# Allegro board RK3568_Template_DDR4P216_ECCP116_SD6_52x40_1332MHz_V10_20210129YWQ.brd
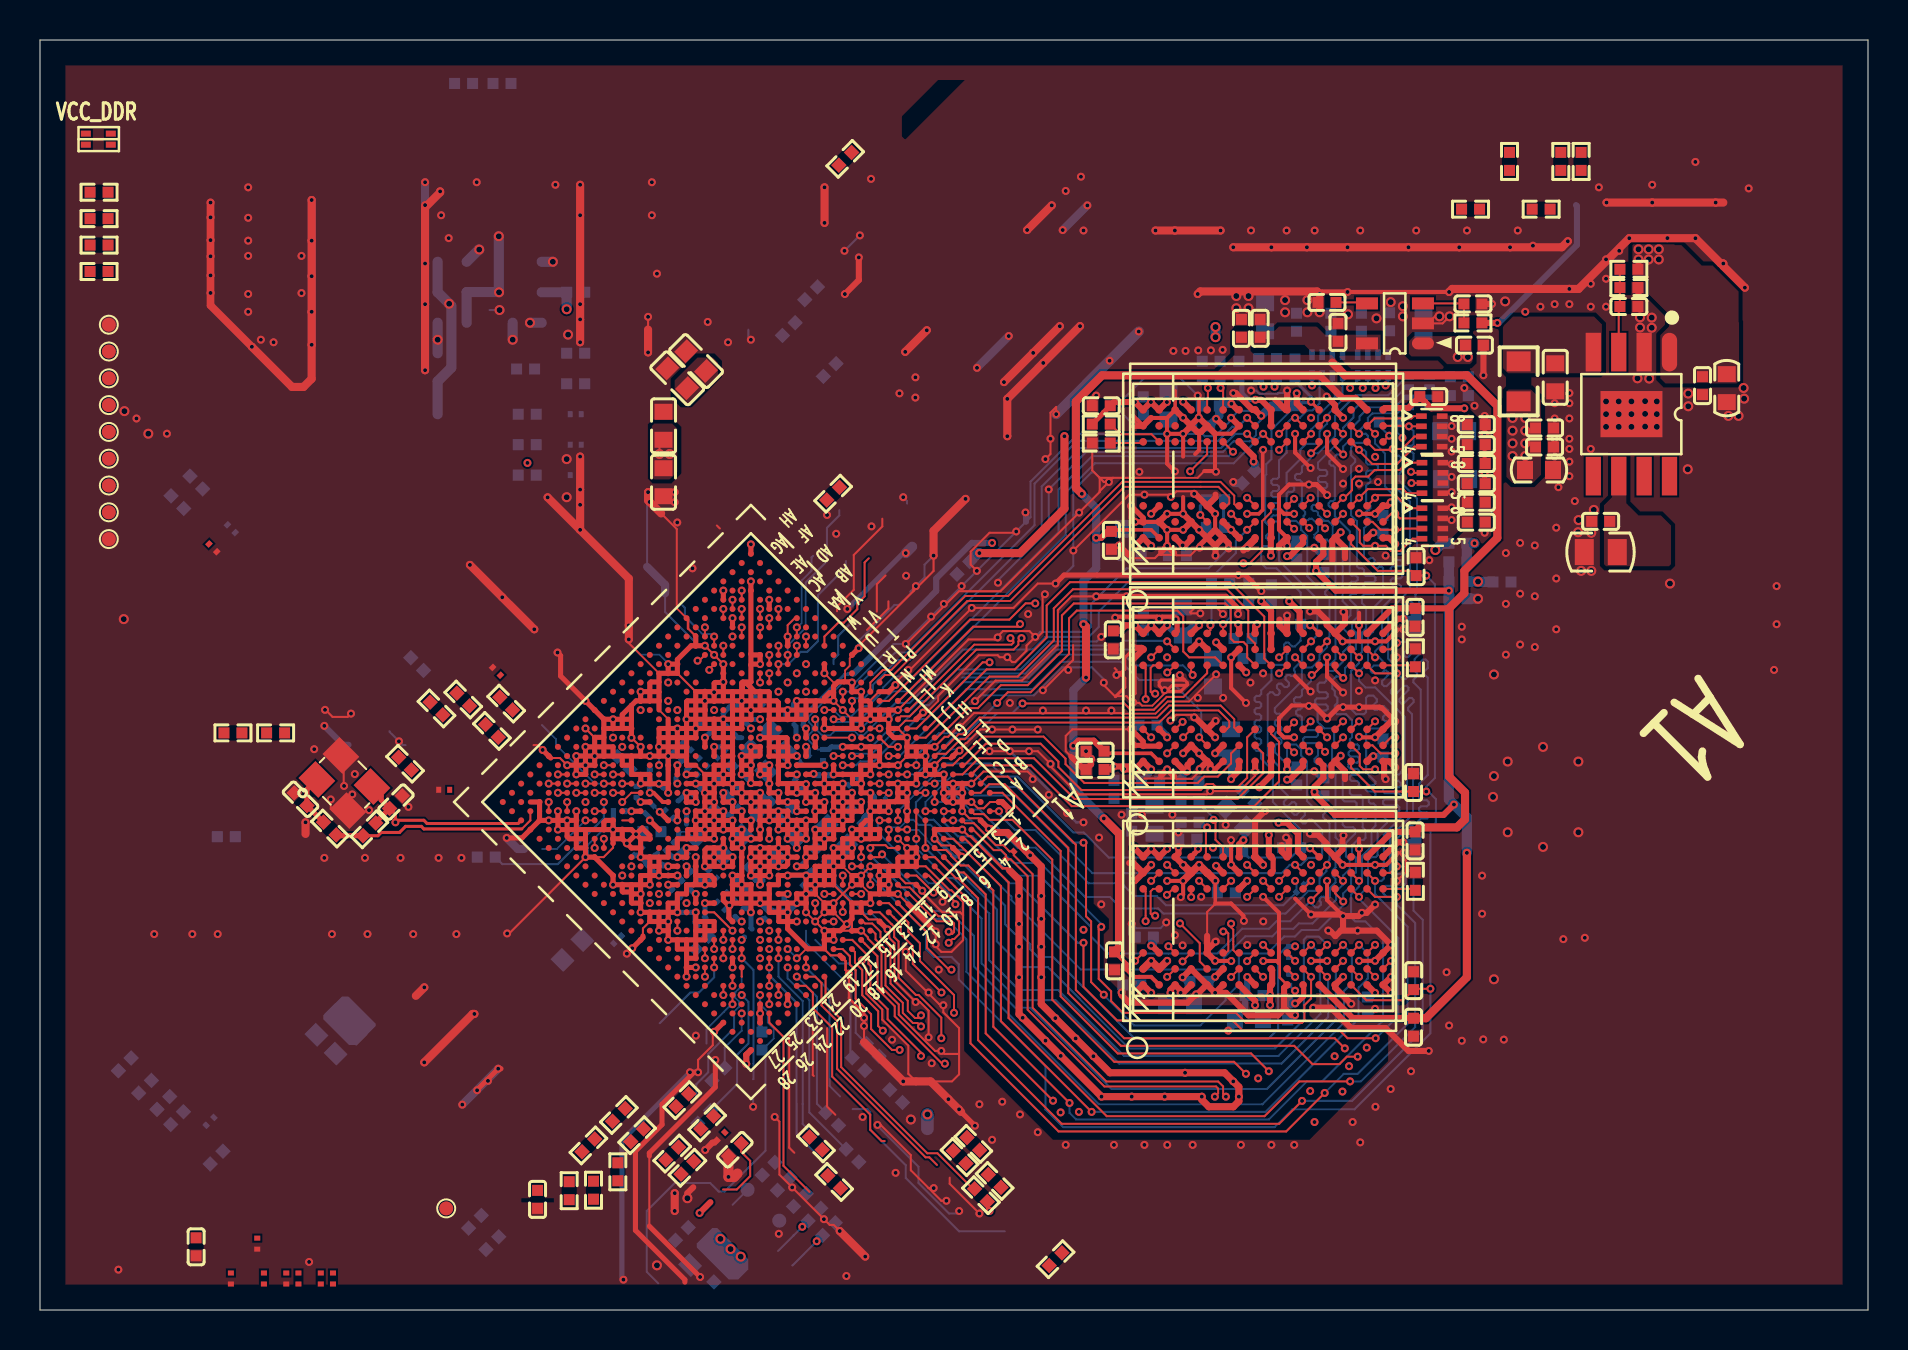
[diagram p0: board, top side]
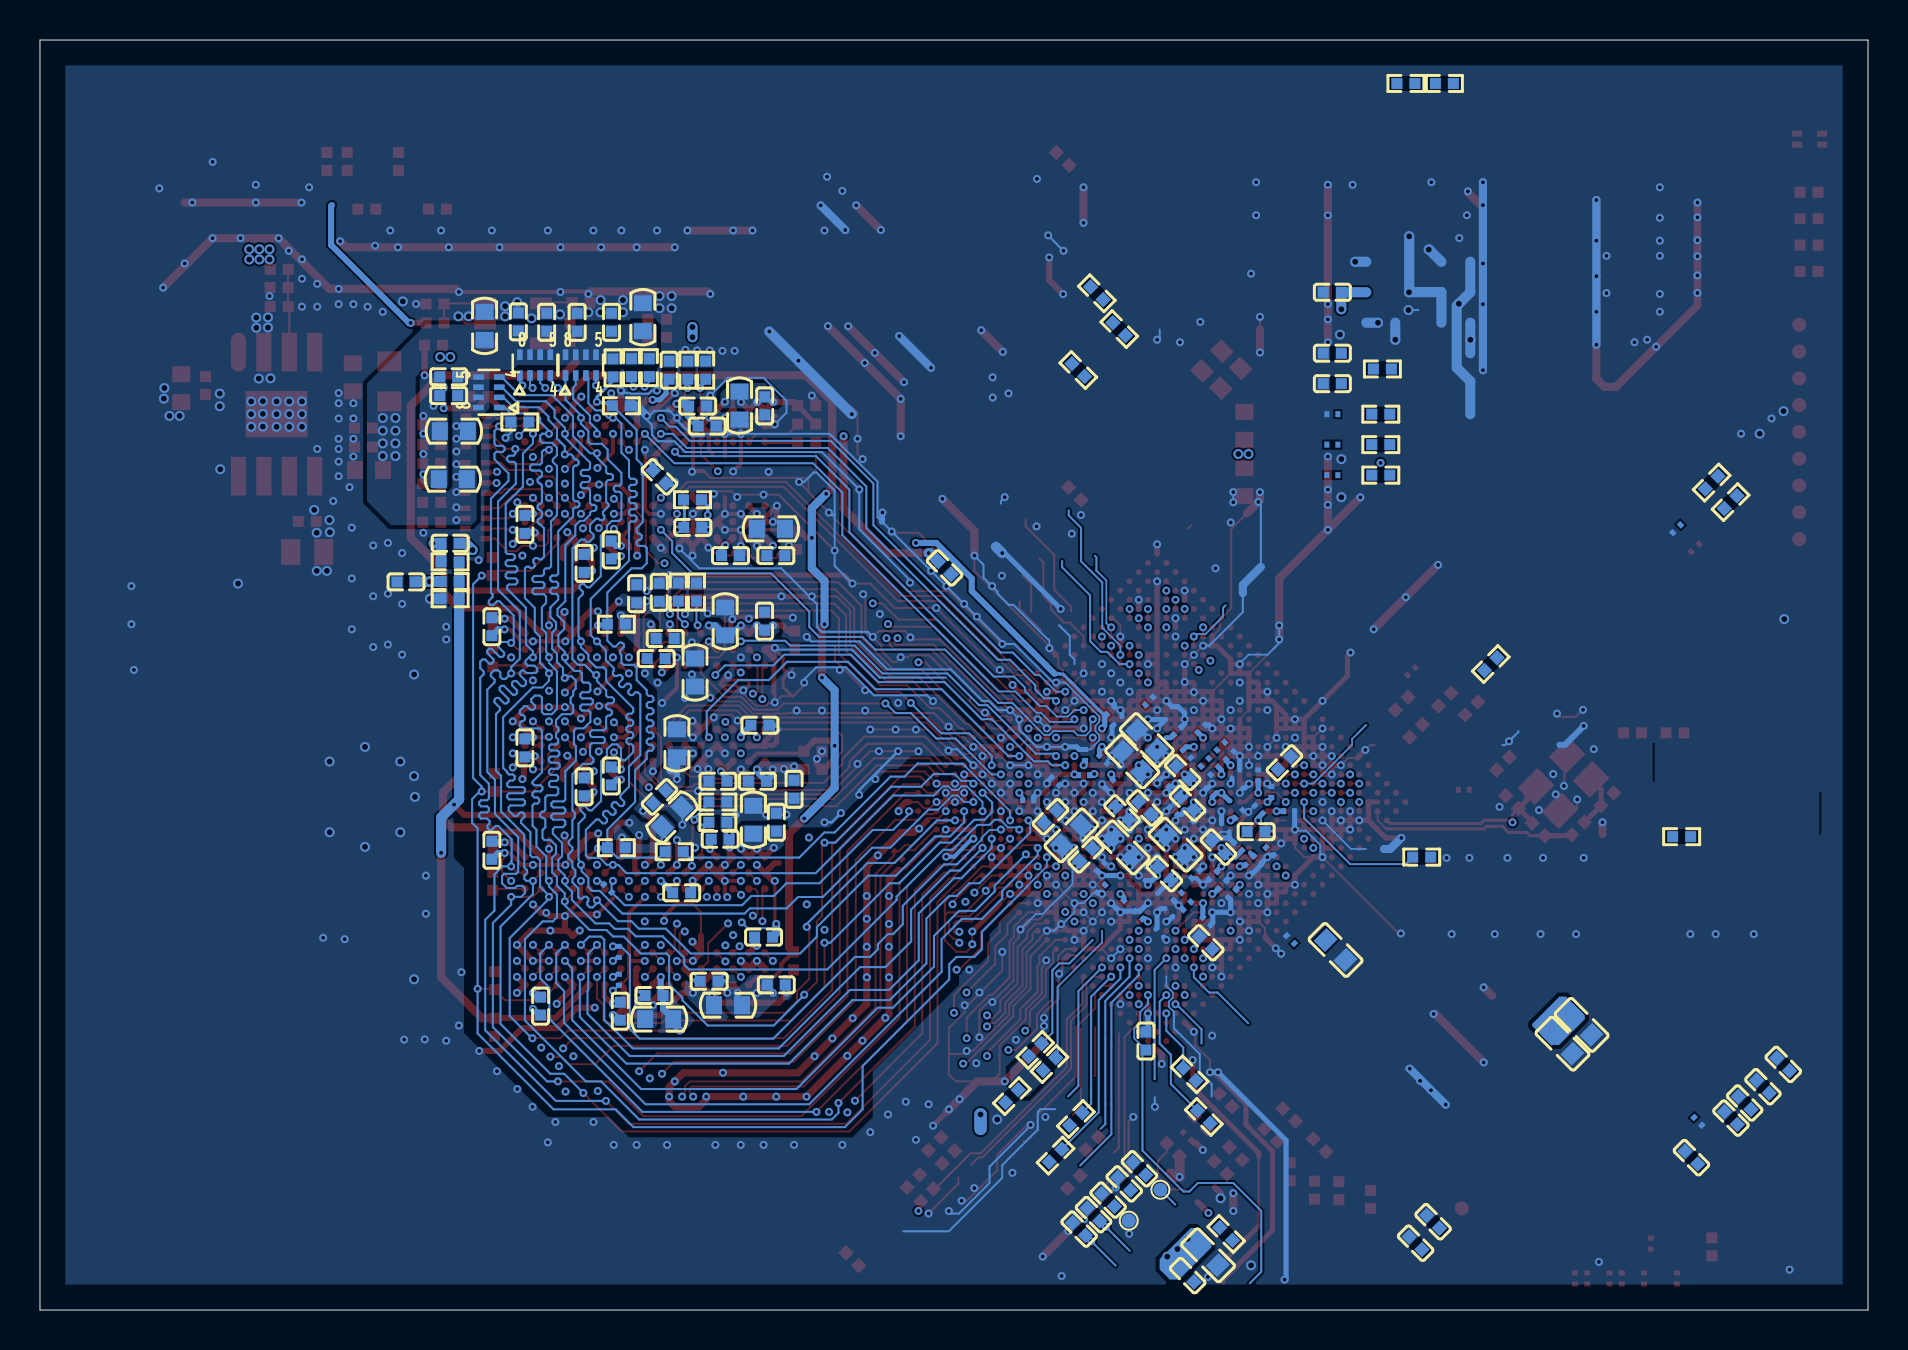
[diagram p1: board, bottom side, seen from below]

Outline 91.44 x 63.5 mm; copper layers: TOP, L2-GND1, L3-POWER, L4-S1, L5-GND2, BOTTOM. Coordinates in mm from the lower left corner of the outline.
Outline path: 0,63.5 0,0 91.44,0 91.44,63.5 0,63.5

## Design rules (mm)
net group CAN0_RX_M1: nets CAN0_RX_M1 SDMMC0_CLK
net group CIF_CLKOUT: nets CIF_CLKOUT CIF_CLKOUT_SOC
net group CLK0: nets PCIE20_REFCLKN PCIE20_REFCLKP
net group CLK32K_OUT1_WIFI: nets CLK32K_OUT1_WIFI GPIO2_C6
net group DDR4_CLK: nets DDR4_CLKN DDR4_CLKP
net group DDR4_DQSL_A: nets DDR4_DQSL_N_A DDR4_DQSL_P_A
net group DDR4_DQSL_B: nets DDR4_DQSL_N_B DDR4_DQSL_P_B
net group DDR4_DQSU_A: nets DDR4_DQSU_N_A DDR4_DQSU_P_A
net group DDR4_DQSU_B: nets DDR4_DQSU_N_B DDR4_DQSU_P_B
net group DDR4_ECC_DQS: nets DDR4_ECC_DQS_N DDR4_ECC_DQS_P
net group DP1: nets EDP_TX_D0N EDP_TX_D0P
net group DP_EDP_TXD0: nets EDP_TXD0N EDP_TXD0P
net group DP_HDMI_TX1: nets HDMI_TX1N HDMI_TX1P
net group DP_HDMI_TX2: nets HDMI_TX2N HDMI_TX2P
net group DP_TX_AUX: nets EDP_TX_AUXN EDP_TX_AUXP
net group EDP_TXD1N: nets EDP_TX_D1N EDP_TXD1N
net group EDP_TXD2N: nets EDP_TX_D2N EDP_TXD2N
net group EDP_TXD3N: nets EDP_TX_D3N EDP_TXD3N
net group EDP_TXD3P: nets EDP_TX_D3P EDP_TXD3P
net group EMMC_CLKOUT/FLASH_DQS: nets EMMC_CLKOUT/FLASH_DQS EMMC_CLKOUT/FLASH_DQS_SOC
net group ETH1_REFCLKO_25M_M1: nets ETH1_REFCLKO_25M_M1 ETH1_REFCLKO_25M_M1_SOC
net group GMAC0_TXD0: nets GMAC0_TXD0 UART1_RX_M0
net group GMAC0_TXD1: nets GMAC0_TXD1 UART1_TX_M0
net group GMAC0_TXD2: nets GMAC0_TXD2 SDMMC1_D3
net group GMAC0_TXD3: nets GMAC0_TXD3 SDMMC1_CMD
net group GMAC1_TXCLK_M1: nets GMAC1_TXCLK_M1 GMAC1_TXCLK_M1_SOC
net group GMAC1_TXD0_M1: nets GMAC1_TXD0_M1 GMAC1_TXD0_M1_SOC
net group GMAC1_TXD2_M1: nets GMAC1_TXD2_M1 GMAC1_TXD2_M1_SOC
net group GMAC1_TXD3_M1: nets GMAC1_TXD3_M1 GMAC1_TXD3_M1_SOC
net group HDMI_TX0N: nets HDMI_TX0N HDMI_TX0N_PORT
net group HDMI_TX0P: nets HDMI_TX0P HDMI_TX0P_PORT
net group HDMI_TX1: nets HDMI_TX1N_PORT HDMI_TX1P_PORT
net group HDMI_TX2: nets HDMI_TX2N_PORT HDMI_TX2P_PORT
net group HDMI_TXCLKN: nets HDMI_TXCLKN HDMI_TXCLKN_PORT
net group HDMI_TXCLKP: nets HDMI_TXCLKP HDMI_TXCLKP_PORT
net group I2S3_SCLK_M0: nets I2S3_SCLK_M0 I2S3_SCLK_M0_SOC
net group LVDS_TX1_CLK: nets MIPI_DSI_TX1_CLKN MIPI_DSI_TX1_CLKP
net group LVDS_TX1_D0: nets MIPI_DSI_TX1_D0N MIPI_DSI_TX1_D0P
net group LVDS_TX1_D1: nets MIPI_DSI_TX1_D1N MIPI_DSI_TX1_D1P
net group LVDS_TX1_D2: nets MIPI_DSI_TX1_D2N MIPI_DSI_TX1_D2P
net group LVDS_TX1_D3: nets MIPI_DSI_TX1_D3N MIPI_DSI_TX1_D3P
net group MIPI_CSI_RX_CLK0: nets MIPI_CSI_RX_CLK0N MIPI_CSI_RX_CLK0P
net group MIPI_CSI_RX_CLK1: nets MIPI_CSI_RX_CLK1N MIPI_CSI_RX_CLK1P
net group MIPI_CSI_RX_D0: nets MIPI_CSI_RX_D0N MIPI_CSI_RX_D0P
net group MIPI_CSI_RX_D1: nets MIPI_CSI_RX_D1N MIPI_CSI_RX_D1P
net group MIPI_CSI_RX_D2: nets MIPI_CSI_RX_D2N MIPI_CSI_RX_D2P
net group MIPI_CSI_RX_D3: nets MIPI_CSI_RX_D3N MIPI_CSI_RX_D3P
net group MIPI_DSI_TX0_CLK: nets MIPI_DSI_TX0_CLKN/LVDS_TX0_CLKN MIPI_DSI_TX0_CLKP/LVDS_TX0_CLKP
net group MIPI_DSI_TX0_D0: nets MIPI_DSI_TX0_D0N/LVDS_TX0_D0N MIPI_DSI_TX0_D0P/LVDS_TX0_D0P
net group MIPI_DSI_TX0_D1: nets MIPI_DSI_TX0_D1N/LVDS_TX0_D1N MIPI_DSI_TX0_D1P/LVDS_TX0_D1P
net group MIPI_DSI_TX0_D2: nets MIPI_DSI_TX0_D2N/LVDS_TX0_D2N MIPI_DSI_TX0_D2P/LVDS_TX0_D2P
net group MIPI_DSI_TX0_D3: nets MIPI_DSI_TX0_D3N/LVDS_TX0_D3N MIPI_DSI_TX0_D3P/LVDS_TX0_D3P
net group PCIE30_REFCLK_IN: nets PCIE30_REFCLKN_IN PCIE30_REFCLKP_IN
net group PCIE30_RX0: nets PCIE30_RX0N PCIE30_RX0P
net group PCIE30_RX1: nets PCIE30_RX1N PCIE30_RX1P
net group PCIE30_TX0: nets PCIE30_TX0N PCIE30_TX0P
net group PCIE30_TX1: nets PCIE30_TX1N PCIE30_TX1P
net group SARADC_VIN0_KEY/RECOVERY: nets SARADC_VIN0_KEY/RECOVERY VCCA_1V8
net group SDMMC0_D2/ARMJTAG_TCK: nets N17520091 SDMMC0_D2/ARMJTAG_TCK
net group SDMMC0_D3/ARMJTAG_TMS: nets N17520047 SDMMC0_D3/ARMJTAG_TMS
net group USB2_HOST2D: nets USB2_HOST2_DM USB2_HOST2_DP
net group USB2_HOST3D: nets USB2_HOST3_DM USB2_HOST3_DP
net group USB3_HOST1D: nets USB3_HOST1_DM USB3_HOST1_DP
net group USB3_OTG0D: nets USB3_OTG0_DM USB3_OTG0_DP
net group DDR_ADD: nets DDR4_RESETN
net group DP2: nets EDP_TXD2P
net group DP3: nets EDP_TXD1P
net group GMAC0_INT/PMEB_GPIO3_C0: nets GMAC0_INT/PMEB_GPIO3_C0 GMAC1_INT/PMEB_GPIO3_A7 I2C2_SCL_M1 I2C5_SDA_M0 VCC_1V8 VCC_3V3 VCCIO4 VCCIO6 VCCIO_WL
net group GMAC0_TXCLK: nets GMAC0_TXCLK GPIO2_B0 SDMMC1_CLK

## Placement (name value [footprint] x y rotation side)
C1000  100nF  [C0402]  34.03 1.72 225 bottom
C1001  4.7uF  [C0402]  35.2 21.81 225 bottom
C1002  22uF  [C0603]  33.02 2.74 225 bottom
C1003  22uF  [C0603]  37.28 23.13 45 bottom
C1004  22uF  [C0603]  26.63 18 225 bottom
C1005  100nF  [C0201]  34.73 24.96 225 bottom
C1006  4.7uF  [C0402]  34.05 25.34 225 bottom
C1007  1uF  [C0402]  36.18 25.1 45 bottom
C1008  1uF  [C0402]  37.32 24.85 225 bottom
C1009  22uF  [C0603]  36.81 27.43 45 bottom
C1010  22uF  [C0603]  31.87 46.59 135 top
C1011  10uF  [C0603]  32.82 47.45 135 top
C1012  100nF  [C0201]  35.17 26.37 225 bottom
C1013  4.7uF  [C0402]  34.28 26.87 225 bottom
C1014  22uF  [C0603]  36.08 28.5 45 bottom
C1015  22uF  [C0603]  31.19 41.39 270 top
C1016  10uF  [C0603]  31.19 44.21 90 top
C1017  100nF  [C0201]  33.65 21.79 315 bottom
C1018  22uF  [C0603]  34.63 23.26 45 bottom
C1019  22uF  [C0603]  15.28 13.32 225 bottom
C1020  10uF  [C0603]  14.33 14.26 225 bottom
C1100  100nF  [C0201]  38.38 22.15 315 bottom
C1101  100nF  [C0201]  40.64 26.43 45 bottom
C1102  4.7uF  [C0402]  39.12 22.76 315 bottom
C1103  4.7uF  [C0402]  40.89 24.66 315 bottom
C1104  10uF  [C0603]  39.85 23.73 315 bottom
C1111  2pF  [C0201]  48.51 22.73 225 top
C1200  100nF  [C0201]  20.22 26.01 180 top
C1201  18pF  [C0402]  13.03 25.54 135 top
C1202  18pF  [C0402]  17.81 25.4 45 top
C1203  100nF  [C0201]  29.85 25.91 90 bottom
C1204  1uF  [C0402]  6.17 10.35 45 bottom
C1205  100nF  [C0201]  30.48 25.02 45 bottom
C1206  1uF  [C0402]  4.24 12.28 45 bottom
C1207  100nF  [C0201]  28.96 24.94 180 bottom
C1208  1uF  [C0402]  26.8 50.89 0 bottom
C1209  100nF  [C0201]  37.98 26.31 315 bottom
C1210  100nF  [C0201]  30.5 26.73 90 bottom
C1211  1uF  [C0402]  26.8 47.84 0 bottom
C1212  100nF  [C0201]  39.21 26.74 0 bottom
C1213  100nF  [C0201]  31.47 24.79 135 bottom
C1214  1uF  [C0402]  5.26 11.16 45 bottom
C1300  100nF  [C0201]  37.42 20.28 315 bottom
C1301  100nF  [C0201]  33.08 19.43 225 bottom
C1400  100nF  [C0402]  24.89 5.53 270 top
C1401  100nF  [C0201]  32.3 21.25 135 bottom
C1402  100nF  [C0201]  31.81 20.81 315 bottom
C1403  100nF  [C0201]  32.76 21.72 315 bottom
C1404  100nF  [C0201]  39.16 27.75 90 bottom
C1405  100nF  [C0201]  38.25 27.53 225 bottom
C1406  100nF  [C0201]  37.9 29.97 135 bottom
C1407  100nF  [C0201]  30.95 22.05 225 bottom
C1408  100nF  [C0201]  31.52 23.16 45 bottom
C1409  4.7uF  [C0402]  32.49 23.14 45 bottom
C1410  4.7uF  [C0402]  8.83 7.62 45 bottom
C1411  100nF  [C0201]  29.92 22.94 225 bottom
C1412  100nF  [C0201]  30.54 22.5 225 bottom
C1413  4.7uF  [C0402]  30.61 23.91 180 bottom
C1414  4.7uF  [C0402]  6.86 9.59 45 bottom
C1500  100nF  [C0201]  34.06 8.69 225 top
C1501  1nF  [C0402]  34.76 8.01 225 top
C1502  1nF  [C0402]  36.12 13.45 90 bottom
C1503  1nF  [C0402]  36.45 7.06 45 bottom
C1504  1nF  [C0402]  38.01 5.5 45 bottom
C1505  1nF  [C0402]  37.2 6.31 45 bottom
C1506  1nF  [C0402]  39.46 4.05 45 bottom
C1507  1nF  [C0402]  38.74 4.77 45 bottom
C1508  1nF  [C0402]  33.12 18.36 45 bottom
C1509  100nF  [C0201]  36.47 19.75 45 bottom
C1510  100nF  [C0201]  28.89 18.52 45 bottom
C1511  100nF  [C0201]  34.54 28.96 135 bottom
C1600  100nF  [C0201]  33.33 29.06 135 bottom
C1601  100nF  [C0201]  34.07 27.81 225 bottom
C1602  100nF  [C0201]  26.8 44.79 0 bottom
C1603  1uF  [C0402]  26.8 46.32 0 bottom
C1700  100nF  [C0201]  31.91 27.73 135 bottom
C1701  100nF  [C0201]  32.69 26.95 315 bottom
C1702  100nF  [C0201]  8.65 38.11 315 top
C1703  100nF  [C0201]  9.57 39.06 315 bottom
C1704  100nF  [C0201]  32.37 28.19 135 bottom
C1705  100nF  [C0201]  33.17 27.38 315 bottom
C1706  100nF  [C0201]  26.8 43.27 0 bottom
C1707  100nF  [C0201]  26.8 41.74 0 bottom
C1708  100nF  [C0201]  14.66 1.57 270 top
C1709  100nF  [C0201]  14.05 1.57 270 top
C1710  100nF  [C0201]  12.93 1.57 270 top
C1711  100nF  [C0201]  11.2 1.57 270 top
C1712  100nF  [C0201]  12.32 1.57 270 top
C1713  100nF  [C0201]  10.87 3.32 270 top
C1714  100nF  [C0201]  9.55 1.57 270 top
C1715  1uF  [C0402]  7.81 3.16 270 top
C1716  1uF  [C0402]  29.19 27.35 135 bottom
C1717  100nF  [C0201]  34.07 20.21 315 bottom
C1718  100nF  [C0201]  34.53 20.67 315 bottom
C1719  4.7uF  [C0402]  22.63 3.34 45 bottom
C1720  4.7uF  [C0402]  21.76 4.41 45 bottom
C1800  100nF  [C0201]  35.96 30.45 135 bottom
C1900  100nF  [C0201]  38.36 21.06 315 bottom
C3500  1nF  [C0402]  68.71 16.47 90 top
C3501  1nF  [C0402]  68.71 26.37 90 top
C3502  100nF  [C0402]  73.13 36.4 0 bottom
C3504  10uF  [C0603]  70.79 41.54 0 bottom
C3505  1uF  [C0402]  71.84 42.33 0 top
C3506  100nF  [C0402]  71.84 43.27 0 top
C3507  10nF  [C0402]  71.84 44.27 0 top
C3509  10uF  [C0603]  70.74 43.94 0 bottom
C3510  1uF  [C0402]  71.84 40.39 0 top
C3511  100nF  [C0402]  71.84 39.39 0 top
C3512  10nF  [C0402]  71.84 41.32 0 top
C3513  1nF  [C0402]  68.83 37.17 90 top
C3514  10uF  [C0603]  61.28 49.64 90 bottom
C3515  1uF  [C0402]  64.57 49.39 90 bottom
C3516  100nF  [C0402]  62.85 49.39 90 bottom
C3517  10nF  [C0402]  66.1 49.39 90 bottom
C3518  10uF  [C0603]  69.2 49.21 90 bottom
C3519  1uF  [C0402]  67.51 49.41 90 bottom
C3520  100nF  [C0402]  71 45.72 0 bottom
C3521  10nF  [C0402]  71 46.66 0 bottom
C3522  1nF  [C0402]  70.92 38.34 0 bottom
C3523  1nF  [C0402]  46.19 37.11 225 bottom
C3524  1nF  [C0402]  64.22 26.16 90 bottom
C3525  1nF  [C0402]  64.22 37.33 90 bottom
C3526  1nF  [C0402]  68.71 14.14 270 top
C3527  100nF  [C0402]  53.09 45.21 180 top
C3528  100nF  [C0402]  62.41 14.94 270 bottom
C3529  22uF  [C0603]  75.79 46.63 270 top
C3530  1uF  [C0402]  71.75 48.24 0 top
C3531  4.7uF  [C0402]  64.93 48.88 90 top
C3532  4.7uF  [C0402]  61.03 49.08 90 top
C3533  100nF  [C0402]  68.78 34.63 270 top
C3534  100nF  [C0402]  53.75 17.46 270 top
C3535  100nF  [C0402]  52.78 27.94 180 top
C3536  100nF  [C0402]  53.59 38.48 270 top
C3537  100nF  [C0402]  68.78 23.46 270 top
C3538  100nF  [C0402]  60.1 49.08 90 top
C3547  10uF  [C0603]  84.37 46.09 270 top
C3548  100nF  [C0402]  83.16 46.22 270 top
C3549  DNP  [C0402]  64.38 50.38 180 top
C3550  DNP  [C0402]  71.68 50.3 0 top
C3551  10uF  [C0805]  78.07 37.9 180 top
C3552  100nF  [C0402]  78.07 39.43 180 top
C3553  100nF  [C0402]  79.48 50.17 0 top
C3554  22uF  [C0603]  74.98 42 0 top
C3555  100nF  [C0402]  75.26 43.15 0 top
C3556  10nF  [C0402]  75.26 44.1 0 top
C3557  10uF  [C0603]  57.17 34.43 90 bottom
C3558  10uF  [C0603]  55.75 24.51 90 bottom
C3559  10uF  [C0603]  59.82 24.64 135 bottom
C3560  100nF  [C0402]  60.46 35.89 90 bottom
C3561  100nF  [C0402]  69.47 45.67 0 top
C3562  100nF  [C0402]  55.2 34.44 90 bottom
C3563  100nF  [C0402]  59.97 46.99 90 bottom
C3564  100nF  [C0402]  54.63 37.72 180 bottom
C3565  100nF  [C0402]  68.83 22.99 270 bottom
C3566  100nF  [C0402]  53.69 33.51 270 top
C3567  1uF  [C0402]  61.59 35.81 90 bottom
C3568  100nF  [C0402]  60.73 15.72 180 bottom
C3569  100nF  [C0402]  57.53 26.44 0 bottom
C3570  100nF  [C0402]  68.83 34.16 270 bottom
C3571  100nF  [C0402]  55.55 26.44 0 bottom
C3572  100nF  [C0402]  55.43 29.24 180 bottom
C3573  100nF  [C0402]  55.19 45.2 270 bottom
C3574  100nF  [C0402]  67.18 28.11 90 bottom
C3575  100nF  [C0402]  58.79 39.13 180 bottom
C3576  100nF  [C0402]  60.17 33.58 0 bottom
C3577  100nF  [C0402]  57.42 23.54 180 bottom
C3578  100nF  [C0402]  62.87 26.7 90 bottom
C3579  100nF  [C0402]  55.25 18.64 180 bottom
C3580  100nF  [C0402]  66.4 15.2 270 bottom
C3581  100nF  [C0402]  67.18 39.28 90 bottom
C3582  100nF  [C0402]  58.54 45.2 180 bottom
C3583  1uF  [C0402]  52.78 27.03 180 top
C3584  100nF  [C0402]  62.87 38 90 bottom
C3585  100nF  [C0402]  60.45 41.66 225 bottom
C3586  100nF  [C0402]  60.45 25.65 315 bottom
C3587  22uF  [C0603]  58.67 31.88 270 bottom
C3588  22uF  [C0603]  56.45 45.22 270 bottom
C3589  10uF  [C0603]  60.47 14.55 180 bottom
C3590  100nF  [C0402]  58.06 44.2 180 bottom
C3591  100nF  [C0402]  54.61 16.26 180 bottom
C3592  100nF  [C0402]  56.9 37.72 180 bottom
C3593  100nF  [C0402]  59.34 20.86 180 bottom
C3594  22uF  [C0603]  57.02 15.24 0 bottom
C3595  10uF  [C0603]  59.58 28.33 90 bottom
C3596  10uF  [C0603]  54.88 39.06 180 bottom
C3597  100nF  [C0402]  53.72 26.03 270 bottom
C3598  100nF  [C0402]  54.61 24.39 90 bottom
C3599  100nF  [C0402]  57.97 16.44 180 bottom
C*  VAL  [unnamed#2]  60.62 32.57 0 bottom
L1700  NC  [RP2_0405]  2.92 58.54 0 top
NOREF  -  []  -65.94 -91.24 0 top
NOREF#2  -  []  -59.13 -91.44 0 top
NOREF#3  -  []  -105.26 -81.69 0 top
NOREF#4  -  []  -21.07 -6.55 0 top
NOREF#5  -  []  -89.51 -101.09 0 top
NOREF#6  -  []  52.32 77.98 0 top
NOREF#7  -  []  -47.96 -107.9 0 top
R1100  120R  [R0201]  42.01 25.5 180 bottom
R1200  22R  [R0402]  14.5 24.07 315 top
R1201  0R  [R0402]  18.26 27.32 315 top
R1202  1M  [R0402]  16.48 24.03 45 top
R1203  22R  [R0402]  11.79 28.85 180 top
R1204  2.2K  [R0402]  9.65 28.85 180 top
R1205  2.2K  [R0402]  22.32 22.64 180 bottom
R1206  2.2K  [R0402]  9.32 23.67 180 bottom
R1207  2.2K  [R0402]  18.87 32.3 315 bottom
R1300  22R  [R0402]  38.81 8.33 315 top
R1301  22R  [R0402]  50.8 2.54 45 top
R1302  22R  [R0402]  39.62 9.55 315 bottom
R1303  22R  [R0402]  39.73 6.4 315 top
R1304  22R  [R0402]  40.64 7.72 315 bottom
R1400  200R  [R0201]  8.51 9.43 225 bottom
R1500  22R  [R0402]  29.87 8.74 225 top
R1501  22R  [R0402]  28.9 6.91 270 top
R1502  22R  [R0402]  32.39 7.11 225 top
R1503  22R  [R0402]  33.38 9.37 225 top
R1504  22R  [R0402]  31.62 7.82 225 top
R1505  22R  [R0402]  32.13 10.49 225 top
R1506  22R  [R0402]  33.93 11.79 225 bottom
R1507  22R  [R0402]  33.22 9.65 225 bottom
R1508  0R  [R0402]  28.96 9.75 225 top
R1509  0R  [R0402]  27.43 8.23 225 top
R1510  0R  [R0402]  26.47 5.97 270 top
R1511  0R  [R0402]  27.69 5.99 270 top
R1512  10K  [R0402]  32.11 3.81 225 bottom
R1600  22R  [R0402]  24.29 47.05 180 bottom
R1601  22R  [R0402]  24.37 44.79 180 bottom
R1602  22R  [R0402]  75.09 55.04 0 top
R1603  22R  [R0402]  77.09 57.43 90 top
R1604  22R  [R0402]  2.95 55.89 0 top
R1605  22R  [R0402]  2.95 54.57 0 top
R1606  2.2K  [R0402]  23.11 61.33 0 bottom
R1607  2.2K  [R0402]  21.19 61.33 180 bottom
R1608  22R  [R0402]  76.07 57.43 90 top
R1609  22R  [R0402]  71.56 55.04 0 top
R1610  0R  [R0402]  73.51 57.43 90 top
R1611  0R  [R0402]  2.95 51.93 0 top
R1700  2.2R  [R0402]  7.82 41.37 135 bottom
R1701  2.2R  [R0402]  24.37 41.74 180 bottom
R1702  2.2R  [R0402]  6.87 40.39 135 bottom
R1703  2.2R  [R0402]  24.37 43.27 180 bottom
R1704  2.2R  [R0402]  19.83 30.08 135 top
R1705  2.2R  [R0402]  21.17 30.52 135 top
R1706  2.2R  [R0402]  22.61 28.96 135 top
R1707  2.2R  [R0402]  23.32 30.32 135 top
R1708  1.62K  [R0201]  22.84 31.93 135 top
R1800  10K  [R0402]  40.28 57.56 45 top
R1801  10K  [R0402]  37.45 49.05 45 bottom
R1802  22R  [R0402]  38.57 50.84 45 bottom
R1803  22R  [R0402]  39.67 40.82 45 top
R1804  2.2K  [R0402]  2.95 53.25 0 top
R1805  2.2K  [R0402]  39.5 47 45 bottom
R1900  2.2K  [R0402]  42.82 10.69 315 bottom
R1901  2.2K  [R0402]  47.75 6.45 315 top
R1902  22R  [R0402]  46.69 8.31 315 top
R1903  22R  [R0402]  41.66 13 135 bottom
R1904  22R  [R0402]  40.94 12.29 135 bottom
R1905  22R  [R0402]  47.07 5.74 315 top
R1906  22R  [R0402]  46 7.65 315 top
R3500  240R  [R0402]  59.51 35.9 90 bottom
R3501  240R  [R0402]  57.53 25.4 180 bottom
R3502  49.9R  [R0201]  62.48 16.51 270 bottom
R3503  49.9R  [R0201]  63.04 21.08 225 bottom
R3504  49.9R  [R0201]  62.48 17.91 90 bottom
R3507  0R  [R0402]  53.09 43.35 0 top
R3508  0R  [R0402]  58.8 40.51 180 bottom
R3509  0R  [R0402]  53.09 44.3 0 top
R3512  240R  [R0402]  59.03 46.99 90 bottom
R3513  1K  [R0402]  70.92 36.42 180 bottom
R3514  0R  [R0402]  70.92 37.41 0 bottom
R3515  1K  [R0402]  70.92 35.56 0 bottom
R3516  10K  [R0402]  71.68 49.35 180 top
R3517  100K  [R0402]  79.48 52.04 180 top
R3518  100K  [R0402]  79.48 51.12 0 top
R3521  39R  [R0402]  61.85 47.12 90 bottom
R3522  39R  [R0402]  60.96 47.12 90 bottom
R3523  39R  [R0402]  62.78 47.1 90 bottom
R3524  0R  [R0402]  68.8 32.61 90 top
R3525  0R  [R0402]  58.6 35.9 90 bottom
R3526  0R  [R0402]  68.8 21.43 90 top
R3527  0R  [R0402]  57.53 24.38 180 bottom
R3528  0R  [R0402]  67.44 44.4 0 bottom
R3529  0R  [R0402]  58.14 46.99 90 bottom
R3530  0R  [R0402]  59.72 22.91 180 bottom
R3531  0R  [R0402]  62.61 23.11 180 bottom
R3532  0R  [R0402]  62.61 34.29 180 bottom
R3533  0R  [R0402]  62.36 45.21 180 bottom
R3537  0.02R  [R0805]  73.96 46.43 270 top
RP3500  39R  [RP4_0408]  69.62 43.93 270 top
RP3501  39R  [RP4_0408]  69.65 39.33 270 top
RP3502  39R  [RP4_0408]  64.39 47.24 180 bottom
RP3503  39R  [RP4_0408]  68.98 45.89 90 bottom
RP3504  39R  [RP4_0408]  66.67 47.24 180 bottom
RP3505  39R  [RP4_0408]  69.65 41.6 270 top
TP1300  TP_0.7  [TP_0R70]  20.32 5.08 0 top
TP1301  TP_0.7  [TP_0R70]  3.44 38.55 0 top
TP1302  TP_0.7  [TP_0R70]  3.44 39.89 0 top
TP1303  TP_0.7  [TP_0R70]  3.44 49.26 0 top
TP1304  TP_0.7  [TP_0R70]  3.44 47.92 0 top
TP1305  TP_0.7  [TP_0R70]  3.44 46.58 0 top
TP1500  TP_0.7  [TP_0R70]  3.44 45.24 0 top
TP1501  TP_0.7  [TP_0R70]  35.4 6.01 135 bottom
TP1502  TP_0.7  [TP_0R70]  36.98 4.47 135 bottom
TP1600  TP_0.7  [TP_0R70]  3.44 43.9 0 top
TP1800  TP_0.7  [TP_0R70]  3.44 42.56 0 top
TP1801  TP_0.7  [TP_0R70]  3.44 41.23 0 top
U1000  RK3568  [BGA636_19R00X19R00X1R20]  35.56 25.4 225 top
U3500  DDR4_16bit  [FBGA96_14R00X11R00X1R20]  61.18 30.63 90 top
U3501  DDR4_16bit  [FBGA96_14R00X11R00X1R20]  61.18 19.46 90 top
U3504  DDR4_16bit  [FBGA96_14R00X11R00X1R20]  61.18 41.81 90 top
U3506  PT5108E23E-25  [SOT_23_5]  69.18 48.33 180 top
U3507  RT9199PSP/RT9045  [SOP8_5R00X4R00X1R75_T]  79.6 44.79 180 top
Y1200  24MHz  [CRY4_3R20X2R50X0R80]  15.23 26.35 315 top

## Library data of the parts
C1000-C1020 C1100-C1104 C1111 C1200-C1214 C1300 C1301 C1400-C1414 C1500-C1511 C1600-C1603 C1700-C1707 C1716-C1720 C1800 C1900 C3500-C3502 C3504-C3507 C3509-C3538 C3547-C3599 = CAP NP
C1708-C1715 = CAP NP: signal model: CAP_NP_C0201_100NF_100nF
L1700 = INDUCTOR COM
R1100 R1200-R1207 R1301 R1400 R1506 R1507 R1604-R1606 R1611 R1700-R1703 R1803 R1804 R1900-R1906 R3500-R3504 R3507-R3509 R3512-R3518 R3521-R3533 R3537 = RESISTOR
R1300 R1302-R1304 R1600-R1603 R1607-R1610 R1800-R1802 R1805 = RESISTOR: signal model: RESISTOR_R0402_0R_0R
R1500-R1505 R1508-R1512 = RESISTOR: signal model: RESISTOR_R0402_22R_22R
R1704-R1708 = RESISTOR: signal model: RESISTOR_R0402_2.2R_2.2R
RP3500-RP3505 = RESISTOR 4PACK
TP1300-TP1305 TP1500-TP1502 TP1600 TP1800 TP1801 = TP
U1000 = SOC_RK3568
U3500 U3501 U3504 = DDR4_16bit
U3506 = LDO_PT5108
U3507 = RT9173C
Y1200 = CRYSTAL_4P

## Footprints (pads in the part's own frame, mm; a bottom-side part is the same pattern mirrored in y, then rotated)
BGA636_19R00X19R00X1R20
  round 0.3 smd: A1(-8.775,8.775) A2(-8.125,8.775) A3(-7.475,8.775) A4(-6.825,8.775) A5(-6.175,8.775) A6(-5.525,8.775) A7(-4.875,8.775) A8(-4.225,8.775) A9(-3.575,8.775) A10(-2.925,8.775) A11(-2.275,8.775) A12(-1.625,8.775) A13(-0.975,8.775) A14(-0.325,8.775) A15(0.325,8.775) A16(0.975,8.775) A17(1.625,8.775) A18(2.275,8.775) A19(2.925,8.775) A20(3.575,8.775) A21(4.225,8.775) A22(4.875,8.775) A23(5.525,8.775) A24(6.175,8.775) A25(6.825,8.775) A26(7.475,8.775) A27(8.125,8.775) A28(8.775,8.775) AA1(-8.775,-4.225) AA2(-8.125,-4.225) AA3(-7.475,-4.225) AA4(-6.825,-4.225) AA5(-6.175,-4.225) AA6(-5.525,-4.225) AA7(-4.875,-4.225) AA9(-3.575,-4.225) AA11(-2.275,-4.225) AA12(-1.625,-4.225) AA14(-0.325,-4.225) AA15(0.325,-4.225) AA17(1.625,-4.225) AA18(2.275,-4.225) AA20(3.575,-4.225) AA22(4.875,-4.225) AA23(5.525,-4.225) AA24(6.175,-4.225) AA25(6.825,-4.225) AA26(7.475,-4.225) AA27(8.125,-4.225) AA28(8.775,-4.225) AB1(-8.775,-4.875) AB2(-8.125,-4.875) AB5(-6.175,-4.875) AB6(-5.525,-4.875) AB8(-4.225,-4.875) AB9(-3.575,-4.875) AB11(-2.275,-4.875) AB12(-1.625,-4.875) AB14(-0.325,-4.875) AB15(0.325,-4.875) AB17(1.625,-4.875) AB18(2.275,-4.875) AB20(3.575,-4.875) AB21(4.225,-4.875) AB23(5.525,-4.875) AB24(6.175,-4.875) AB27(8.125,-4.875) AB28(8.775,-4.875) AC1(-8.775,-5.525) AC2(-8.125,-5.525) AC3(-7.475,-5.525) AC4(-6.825,-5.525) AC5(-6.175,-5.525) AC7(-4.875,-5.525) AC8(-4.225,-5.525) AC9(-3.575,-5.525) AC11(-2.275,-5.525) AC12(-1.625,-5.525) AC14(-0.325,-5.525) AC15(0.325,-5.525) AC17(1.625,-5.525) AC18(2.275,-5.525) AC20(3.575,-5.525) AC21(4.225,-5.525) AC22(4.875,-5.525) AC24(6.175,-5.525) AC25(6.825,-5.525) AC26(7.475,-5.525) AC27(8.125,-5.525) AC28(8.775,-5.525) AD1(-8.775,-6.175) AD2(-8.125,-6.175) AD3(-7.475,-6.175) AD4(-6.825,-6.175) AD6(-5.525,-6.175) AD7(-4.875,-6.175) AD8(-4.225,-6.175) AD9(-3.575,-6.175) AD11(-2.275,-6.175) AD12(-1.625,-6.175) AD14(-0.325,-6.175) AD15(0.325,-6.175) AD17(1.625,-6.175) AD18(2.275,-6.175) AD20(3.575,-6.175) AD21(4.225,-6.175) AD22(4.875,-6.175) AD23(5.525,-6.175) AD25(6.825,-6.175) AD26(7.475,-6.175) AD27(8.125,-6.175) AD28(8.775,-6.175) AE1(-8.775,-6.825) AE2(-8.125,-6.825) AE3(-7.475,-6.825) AE5(-6.175,-6.825) AE6(-5.525,-6.825) AE8(-4.225,-6.825) AE9(-3.575,-6.825) AE11(-2.275,-6.825) AE12(-1.625,-6.825) AE14(-0.325,-6.825) AE15(0.325,-6.825) AE17(1.625,-6.825) AE18(2.275,-6.825) AE20(3.575,-6.825) AE21(4.225,-6.825) AE23(5.525,-6.825) AE24(6.175,-6.825) AE26(7.475,-6.825) AE27(8.125,-6.825) AE28(8.775,-6.825) AF1(-8.775,-7.475) AF2(-8.125,-7.475) AF3(-7.475,-7.475) AF4(-6.825,-7.475) AF5(-6.175,-7.475) AF6(-5.525,-7.475) AF8(-4.225,-7.475) AF9(-3.575,-7.475) AF11(-2.275,-7.475) AF12(-1.625,-7.475) AF14(-0.325,-7.475) AF15(0.325,-7.475) AF17(1.625,-7.475) AF18(2.275,-7.475) AF20(3.575,-7.475) AF21(4.225,-7.475) AF23(5.525,-7.475) AF24(6.175,-7.475) AF25(6.825,-7.475) AF26(7.475,-7.475) AF27(8.125,-7.475) AF28(8.775,-7.475) AG1(-8.775,-8.125) AG2(-8.125,-8.125) AG3(-7.475,-8.125) AG4(-6.825,-8.125) AG5(-6.175,-8.125) AG6(-5.525,-8.125) AG7(-4.875,-8.125) AG8(-4.225,-8.125) AG9(-3.575,-8.125) AG10(-2.925,-8.125) AG11(-2.275,-8.125) AG12(-1.625,-8.125) AG13(-0.975,-8.125) AG14(-0.325,-8.125) AG15(0.325,-8.125) AG16(0.975,-8.125) AG17(1.625,-8.125) AG18(2.275,-8.125) AG19(2.925,-8.125) AG20(3.575,-8.125) AG21(4.225,-8.125) AG22(4.875,-8.125) AG23(5.525,-8.125) AG24(6.175,-8.125) AG25(6.825,-8.125) AG26(7.475,-8.125) AG27(8.125,-8.125) AG28(8.775,-8.125) AH1(-8.775,-8.775) AH2(-8.125,-8.775) AH3(-7.475,-8.775) AH4(-6.825,-8.775) AH5(-6.175,-8.775) AH6(-5.525,-8.775) AH7(-4.875,-8.775) AH8(-4.225,-8.775) AH9(-3.575,-8.775) AH10(-2.925,-8.775) AH11(-2.275,-8.775) AH12(-1.625,-8.775) AH13(-0.975,-8.775) AH14(-0.325,-8.775) AH15(0.325,-8.775) AH16(0.975,-8.775) AH17(1.625,-8.775) AH18(2.275,-8.775) AH19(2.925,-8.775) AH20(3.575,-8.775) AH21(4.225,-8.775) AH22(4.875,-8.775) AH23(5.525,-8.775) AH24(6.175,-8.775) AH25(6.825,-8.775) AH26(7.475,-8.775) AH27(8.125,-8.775) AH28(8.775,-8.775) B1(-8.775,8.125) B2(-8.125,8.125) B3(-7.475,8.125) B4(-6.825,8.125) B5(-6.175,8.125) B6(-5.525,8.125) B7(-4.875,8.125) B8(-4.225,8.125) B9(-3.575,8.125) B10(-2.925,8.125) B11(-2.275,8.125) B12(-1.625,8.125) B13(-0.975,8.125) B14(-0.325,8.125) B15(0.325,8.125) B16(0.975,8.125) B17(1.625,8.125) B18(2.275,8.125) B19(2.925,8.125) B20(3.575,8.125) B21(4.225,8.125) B22(4.875,8.125) B23(5.525,8.125) B24(6.175,8.125) B25(6.825,8.125) B26(7.475,8.125) B27(8.125,8.125) B28(8.775,8.125) C1(-8.775,7.475) C2(-8.125,7.475) C3(-7.475,7.475) C4(-6.825,7.475) C5(-6.175,7.475) C6(-5.525,7.475) C8(-4.225,7.475) C9(-3.575,7.475) C11(-2.275,7.475) C12(-1.625,7.475) C14(-0.325,7.475) C15(0.325,7.475) C17(1.625,7.475) C18(2.275,7.475) C20(3.575,7.475) C21(4.225,7.475) C23(5.525,7.475) C24(6.175,7.475) C25(6.825,7.475) C26(7.475,7.475) C27(8.125,7.475) C28(8.775,7.475) D1(-8.775,6.825) D2(-8.125,6.825) D3(-7.475,6.825) D5(-6.175,6.825) D6(-5.525,6.825) D8(-4.225,6.825) D9(-3.575,6.825) D11(-2.275,6.825) D12(-1.625,6.825) D14(-0.325,6.825) D15(0.325,6.825) D17(1.625,6.825) D18(2.275,6.825) D20(3.575,6.825) D21(4.225,6.825) D23(5.525,6.825) D24(6.175,6.825) D26(7.475,6.825) D27(8.125,6.825) D28(8.775,6.825) E1(-8.775,6.175) E2(-8.125,6.175) E3(-7.475,6.175) E4(-6.825,6.175) E6(-5.525,6.175) E7(-4.875,6.175) E8(-4.225,6.175) E9(-3.575,6.175) E11(-2.275,6.175) E12(-1.625,6.175) E14(-0.325,6.175) E15(0.325,6.175) E17(1.625,6.175) E18(2.275,6.175) E20(3.575,6.175) E21(4.225,6.175) E22(4.875,6.175) E23(5.525,6.175) E25(6.825,6.175) E26(7.475,6.175) E27(8.125,6.175) E28(8.775,6.175) F1(-8.775,5.525) F2(-8.125,5.525) F3(-7.475,5.525) F4(-6.825,5.525) F5(-6.175,5.525) F7(-4.875,5.525) F8(-4.225,5.525) F9(-3.575,5.525) F11(-2.275,5.525) F12(-1.625,5.525) F14(-0.325,5.525) F15(0.325,5.525) F17(1.625,5.525) F18(2.275,5.525) F20(3.575,5.525) F21(4.225,5.525) F22(4.875,5.525) F24(6.175,5.525) F25(6.825,5.525) F26(7.475,5.525) F27(8.125,5.525) F28(8.775,5.525) G1(-8.775,4.875) G2(-8.125,4.875) G5(-6.175,4.875) G6(-5.525,4.875) G8(-4.225,4.875) G9(-3.575,4.875) G11(-2.275,4.875) G12(-1.625,4.875) G14(-0.325,4.875) G15(0.325,4.875) G17(1.625,4.875) G18(2.275,4.875) G20(3.575,4.875) G21(4.225,4.875) G23(5.525,4.875) G24(6.175,4.875) G27(8.125,4.875) G28(8.775,4.875) H1(-8.775,4.225) H2(-8.125,4.225) H3(-7.475,4.225) H4(-6.825,4.225) H5(-6.175,4.225) H6(-5.525,4.225) H7(-4.875,4.225) H9(-3.575,4.225) H11(-2.275,4.225) H12(-1.625,4.225) H14(-0.325,4.225) H15(0.325,4.225) H17(1.625,4.225) H18(2.275,4.225) H20(3.575,4.225) H22(4.875,4.225) H23(5.525,4.225) H24(6.175,4.225) H25(6.825,4.225) H26(7.475,4.225) H27(8.125,4.225) H28(8.775,4.225) J1(-8.775,3.575) J2(-8.125,3.575) J3(-7.475,3.575) J4(-6.825,3.575) J5(-6.175,3.575) J6(-5.525,3.575) J7(-4.875,3.575) J8(-4.225,3.575) J9(-3.575,3.575) J11(-2.275,3.575) J12(-1.625,3.575) J14(-0.325,3.575) J15(0.325,3.575) J17(1.625,3.575) J18(2.275,3.575) J20(3.575,3.575) J21(4.225,3.575) J22(4.875,3.575) J23(5.525,3.575) J24(6.175,3.575) J25(6.825,3.575) J26(7.475,3.575) J27(8.125,3.575) J28(8.775,3.575) K1(-8.775,2.925) K2(-8.125,2.925) K10(-2.925,2.925) K11(-2.275,2.925) K12(-1.625,2.925) K13(-0.975,2.925) K14(-0.325,2.925) K15(0.325,2.925) K16(0.975,2.925) K17(1.625,2.925) K18(2.275,2.925) K19(2.925,2.925) K27(8.125,2.925) K28(8.775,2.925) L1(-8.775,2.275) L2(-8.125,2.275) L3(-7.475,2.275) L4(-6.825,2.275) L5(-6.175,2.275) L6(-5.525,2.275) L7(-4.875,2.275) L8(-4.225,2.275) L9(-3.575,2.275) L10(-2.925,2.275) L11(-2.275,2.275) L12(-1.625,2.275) L13(-0.975,2.275) L14(-0.325,2.275) L15(0.325,2.275) L16(0.975,2.275) L17(1.625,2.275) L18(2.275,2.275) L19(2.925,2.275) L20(3.575,2.275) L21(4.225,2.275) L22(4.875,2.275) L23(5.525,2.275) L24(6.175,2.275) L25(6.825,2.275) L26(7.475,2.275) L27(8.125,2.275) L28(8.775,2.275) M1(-8.775,1.625) M2(-8.125,1.625) M3(-7.475,1.625) M4(-6.825,1.625) M5(-6.175,1.625) M6(-5.525,1.625) M7(-4.875,1.625) M8(-4.225,1.625) M9(-3.575,1.625) M10(-2.925,1.625) M11(-2.275,1.625) M12(-1.625,1.625) M13(-0.975,1.625) M14(-0.325,1.625) M15(0.325,1.625) M16(0.975,1.625) M17(1.625,1.625) M18(2.275,1.625) M19(2.925,1.625) M20(3.575,1.625) M21(4.225,1.625) M22(4.875,1.625) M23(5.525,1.625) M24(6.175,1.625) M25(6.825,1.625) M26(7.475,1.625) M27(8.125,1.625) M28(8.775,1.625) N1(-8.775,0.975) N2(-8.125,0.975) N10(-2.925,0.975) N11(-2.275,0.975) N12(-1.625,0.975) N13(-0.975,0.975) N14(-0.325,0.975) N15(0.325,0.975) N16(0.975,0.975) N17(1.625,0.975) N18(2.275,0.975) N19(2.925,0.975) N27(8.125,0.975) N28(8.775,0.975) P1(-8.775,0.325) P2(-8.125,0.325) P3(-7.475,0.325) P4(-6.825,0.325) P5(-6.175,0.325) P6(-5.525,0.325) P7(-4.875,0.325) P8(-4.225,0.325) P9(-3.575,0.325) P10(-2.925,0.325) P11(-2.275,0.325) P12(-1.625,0.325) P13(-0.975,0.325) P14(-0.325,0.325) P15(0.325,0.325) P16(0.975,0.325) P17(1.625,0.325) P18(2.275,0.325) P19(2.925,0.325) P20(3.575,0.325) P21(4.225,0.325) P22(4.875,0.325) P23(5.525,0.325) P24(6.175,0.325) P25(6.825,0.325) P26(7.475,0.325) P27(8.125,0.325) P28(8.775,0.325) R1(-8.775,-0.325) R2(-8.125,-0.325) R3(-7.475,-0.325) R4(-6.825,-0.325) R5(-6.175,-0.325) R6(-5.525,-0.325) R7(-4.875,-0.325) R8(-4.225,-0.325) R9(-3.575,-0.325) R10(-2.925,-0.325) R11(-2.275,-0.325) R12(-1.625,-0.325) R13(-0.975,-0.325) R14(-0.325,-0.325) R15(0.325,-0.325) R16(0.975,-0.325) R17(1.625,-0.325) R18(2.275,-0.325) R19(2.925,-0.325) R20(3.575,-0.325) R21(4.225,-0.325) R22(4.875,-0.325) R23(5.525,-0.325) R24(6.175,-0.325) R25(6.825,-0.325) R26(7.475,-0.325) R27(8.125,-0.325) R28(8.775,-0.325) T1(-8.775,-0.975) T2(-8.125,-0.975) T10(-2.925,-0.975) T11(-2.275,-0.975) T12(-1.625,-0.975) T13(-0.975,-0.975) T14(-0.325,-0.975) T15(0.325,-0.975) T16(0.975,-0.975) T17(1.625,-0.975) T18(2.275,-0.975) T19(2.925,-0.975) T27(8.125,-0.975) T28(8.775,-0.975) U1(-8.775,-1.625) U2(-8.125,-1.625) U3(-7.475,-1.625) U4(-6.825,-1.625) U5(-6.175,-1.625) U6(-5.525,-1.625) U7(-4.875,-1.625) U8(-4.225,-1.625) U9(-3.575,-1.625) U10(-2.925,-1.625) U11(-2.275,-1.625) U12(-1.625,-1.625) U13(-0.975,-1.625) U14(-0.325,-1.625) U15(0.325,-1.625) U16(0.975,-1.625) U17(1.625,-1.625) U18(2.275,-1.625) U19(2.925,-1.625) U20(3.575,-1.625) U21(4.225,-1.625) U22(4.875,-1.625) U23(5.525,-1.625) U24(6.175,-1.625) U25(6.825,-1.625) U26(7.475,-1.625) U27(8.125,-1.625) U28(8.775,-1.625) V1(-8.775,-2.275) V2(-8.125,-2.275) V3(-7.475,-2.275) V4(-6.825,-2.275) V5(-6.175,-2.275) V6(-5.525,-2.275) V7(-4.875,-2.275) V8(-4.225,-2.275) V9(-3.575,-2.275) V10(-2.925,-2.275) V11(-2.275,-2.275) V12(-1.625,-2.275) V13(-0.975,-2.275) V14(-0.325,-2.275) V15(0.325,-2.275) V16(0.975,-2.275) V17(1.625,-2.275) V18(2.275,-2.275) V19(2.925,-2.275) V20(3.575,-2.275) V21(4.225,-2.275) V22(4.875,-2.275) V23(5.525,-2.275) V24(6.175,-2.275) V25(6.825,-2.275) V26(7.475,-2.275) V27(8.125,-2.275) V28(8.775,-2.275) W1(-8.775,-2.925) W2(-8.125,-2.925) W10(-2.925,-2.925) W11(-2.275,-2.925) W12(-1.625,-2.925) W13(-0.975,-2.925) W14(-0.325,-2.925) W15(0.325,-2.925) W16(0.975,-2.925) W17(1.625,-2.925) W18(2.275,-2.925) W19(2.925,-2.925) W27(8.125,-2.925) W28(8.775,-2.925) Y1(-8.775,-3.575) Y2(-8.125,-3.575) Y3(-7.475,-3.575) Y4(-6.825,-3.575) Y5(-6.175,-3.575) Y6(-5.525,-3.575) Y7(-4.875,-3.575) Y8(-4.225,-3.575) Y9(-3.575,-3.575) Y11(-2.275,-3.575) Y12(-1.625,-3.575) Y14(-0.325,-3.575) Y15(0.325,-3.575) Y17(1.625,-3.575) Y18(2.275,-3.575) Y20(3.575,-3.575) Y21(4.225,-3.575) Y22(4.875,-3.575) Y23(5.525,-3.575) Y24(6.175,-3.575) Y25(6.825,-3.575) Y26(7.475,-3.575) Y27(8.125,-3.575) Y28(8.775,-3.575)
C0201
  rect 0.25x0.3 smd: 1(-0.275,0) 2(0.275,0)
C0402
  rect 0.55x0.55 smd: 1(-0.45,0) 2(0.45,0)
C0603
  rect 0.8x0.9 smd: 1(-0.7,0) 2(0.7,0)
C0805
  rect 0.95x1.3 smd: 1(-0.825,0) 2(0.825,0)
CRY4_3R20X2R50X0R80
  rect 1.4x1.2 smd: 1(-1.1,-0.85) 2(1.1,-0.85) 3(1.1,0.85) 4(-1.1,0.85)
FBGA96_14R00X11R00X1R20
  round 0.38 smd: A1(-3.2,6) A2(-2.4,6) A3(-1.6,6) A7(1.6,6) A8(2.4,6) A9(3.2,6) B1(-3.2,5.2) B2(-2.4,5.2) B3(-1.6,5.2) B7(1.6,5.2) B8(2.4,5.2) B9(3.2,5.2) C1(-3.2,4.4) C2(-2.4,4.4) C3(-1.6,4.4) C7(1.6,4.4) C8(2.4,4.4) C9(3.2,4.4) D1(-3.2,3.6) D2(-2.4,3.6) D3(-1.6,3.6) D7(1.6,3.6) D8(2.4,3.6) D9(3.2,3.6) E1(-3.2,2.8) E2(-2.4,2.8) E3(-1.6,2.8) E7(1.6,2.8) E8(2.4,2.8) E9(3.2,2.8) F1(-3.2,2) F2(-2.4,2) F3(-1.6,2) F7(1.6,2) F8(2.4,2) F9(3.2,2) G1(-3.2,1.2) G2(-2.4,1.2) G3(-1.6,1.2) G7(1.6,1.2) G8(2.4,1.2) G9(3.2,1.2) H1(-3.2,0.4) H2(-2.4,0.4) H3(-1.6,0.4) H7(1.6,0.4) H8(2.4,0.4) H9(3.2,0.4) J1(-3.2,-0.4) J2(-2.4,-0.4) J3(-1.6,-0.4) J7(1.6,-0.4) J8(2.4,-0.4) J9(3.2,-0.4) K1(-3.2,-1.2) K2(-2.4,-1.2) K3(-1.6,-1.2) K7(1.6,-1.2) K8(2.4,-1.2) K9(3.2,-1.2) L1(-3.2,-2) L2(-2.4,-2) L3(-1.6,-2) L7(1.6,-2) L8(2.4,-2) L9(3.2,-2) M1(-3.2,-2.8) M2(-2.4,-2.8) M3(-1.6,-2.8) M7(1.6,-2.8) M8(2.4,-2.8) M9(3.2,-2.8) N1(-3.2,-3.6) N2(-2.4,-3.6) N3(-1.6,-3.6) N7(1.6,-3.6) N8(2.4,-3.6) N9(3.2,-3.6) P1(-3.2,-4.4) P2(-2.4,-4.4) P3(-1.6,-4.4) P7(1.6,-4.4) P8(2.4,-4.4) P9(3.2,-4.4) R1(-3.2,-5.2) R2(-2.4,-5.2) R3(-1.6,-5.2) R7(1.6,-5.2) R8(2.4,-5.2) R9(3.2,-5.2) T1(-3.2,-6) T2(-2.4,-6) T3(-1.6,-6) T7(1.6,-6) T8(2.4,-6) T9(3.2,-6)
R0201
  rect 0.25x0.3 smd: 1(-0.275,0) 2(0.275,0)
R0402
  rect 0.55x0.55 smd: 1(-0.45,0) 2(0.45,0)
R0805
  rect 1x1.2 smd: 1(-1,0) 2(1,0)
RP2_0405
  rect 0.5x0.3 smd: 1(-0.625,-0.275) 2(0.625,-0.275) 3(-0.625,0.275) 4(0.625,0.275)
RP4_0408
  rect 0.279x0.533 smd: 1(-0.762,-0.521) 2(-0.254,-0.521) 3(0.254,-0.521) 4(0.762,-0.521) 5(0.762,0.521) 6(0.254,0.521) 7(-0.254,0.521) 8(-0.762,0.521)
SOP8_5R00X4R00X1R75_T
  oval 0.762x1.93 smd: 1(-1.91,-3.1)
  rect 0.762x1.93 smd: 2(-0.64,-3.1) 3(0.63,-3.1) 4(1.9,-3.1) 5(1.9,3.1) 6(0.63,3.1) 7(-0.64,3.1) 8(-1.91,3.1)
  rect 3.1x2.31 smd: 9(-0.005,0)
SOT_23_5
  oval 1.1x0.6 smd: 1(0,0)
  rect 1.1x0.6 smd: 2(0,-1) 3(0,-2) 4(2.8,-2) 5(2.8,0)
TP_0R70
  round 0.7 smd: 1(0,0)
unnamed#2
  rect 0.55x0.55 smd: 1(-0.45,0) 2(0.45,0)

## Nets
DDR4_BG1/VSS_M9: R3523.1 R3530.1 R3531.1 R3532.1 R3533.1 U3500.M9(VSS#M9) U3501.M9(VSS#M9) U3504.M9(VSS#M9)
GND: C1000.2 C1001.2 C1002.2 C1003.2 C1004.2 C1005.2 C1006.2 C1007.2 C1008.2 C1009.2 C1010.2 C1011.2 C1012.2 C1013.2 C1014.2 C1015.2 C1016.2 C1017.2 C1018.2 C1019.2 C1020.2 C1100.2 C1101.2 C1102.2 C1103.2 C1104.2 C1200.2 C1201.2 C1202.2 C1203.2 C1204.2 C1205.2 C1206.2 C1207.2 C1208.2 C1209.2 C1210.2 C1211.2 C1212.2 C1213.2 C1214.2 C1300.2 C1301.2 C1400.2 C1401.2 C1402.2 C1403.2 C1404.2 C1405.2 C1406.2 C1407.2 C1408.2 C1409.2 C1410.2 C1411.2 C1412.2 C1413.2 C1414.2 C1500.2 C1501.2 C1502.2 C1503.2 C1504.2 C1505.2 C1506.2 C1507.2 C1508.2 C1509.2 C1510.2 C1511.2 C1600.2 C1601.2 C1602.2 C1603.2 C1700.2 C1701.2 C1702.2 C1703.2 C1712.2 C1713.2 C1714.2 C1715.2 C1716.2 C1717.2 C1718.2 C1719.2 C1720.2 C1800.2 C1900.2 C3500.2 C3501.2 C3502.2 C3504.2 C3505.2 C3506.2 C3507.2 C3509.2 C3510.2 C3511.2 C3512.2 C3513.2 C3514.2 C3515.2 C3516.2 C3517.2 C3518.2 C3519.2 C3520.2 C3521.2 C3523.2 C3524.2 C3525.2 C3526.2 C3527.2 C3528.2 C3529.2 C3530.2 C3531.2 C3532.2 C3533.2 C3534.2 C3535.2 C3536.2 C3537.2 C3538.2 C3547.2 C3548.2 C3549.2 C3550.2 C3551.2 C3552.2 C3553.2 C3554.2 C3555.2 C3556.2 C3557.2 C3558.2 C3559.2 C3560.2 C3561.2 C3562.2 C3563.2 C3564.2 C3565.2 C3566.2 C3567.2 C3568.2 C3569.2 C3570.2 C3571.2 C3572.2 C3573.2 C3574.2 C3575.2 C3576.2 C3577.2 C3578.2 C3579.2 C3580.2 C3581.2 C3582.2 C3583.2 C3584.2 C3585.2 C3586.2 C3587.2 C3588.2 C3589.2 C3590.2 C3591.2 C3592.2 C3593.2 C3594.2 C3595.2 C3596.2 C3597.2 C3598.2 C3599.2 R1100.2 R1400.2 R1708.2 R3500.2 R3501.2 R3507.1 R3512.2 R3515.2 R3518.2 R3524.2 R3525.2 R3526.2 R3527.2 R3528.2 R3529.2 R3531.2 R3532.2 R3533.2 TP1301.1 TP1303.1 TP1502.1 U1000.A1(VSS_1) U1000.A3(VSS_2) U1000.A6(VSS_3) U1000.A10(VSS_4) U1000.A14(VSS_5) U1000.A18(VSS_6) U1000.A28(VSS_7) U1000.AA4(VSS_133) U1000.AA9(VSS_134) U1000.AA12(AVSS_24) U1000.AA14(AVSS_25) U1000.AA15(AVSS_26) U1000.AA17(AVSS_27) U1000.AA23(VSS_135) U1000.AA24(AVSS_28) U1000.AA26(AVSS_29) U1000.AB2(VSS_136) U1000.AB6(VSS_137) U1000.AB11(AVSS_30) U1000.AB12(AVSS_31) U1000.AB14(AVSS_32) U1000.AB15(AVSS_33) U1000.AB17(AVSS_34) U1000.AB24(TVSS) U1000.AC9(AVSS_35) U1000.AC11(AVSS_36) U1000.AC12(AVSS_37) U1000.AC15(AVSS_38) U1000.AC18(AVSS_39) U1000.AC25(AVSS_40) U1000.AC26(AVSS_41) U1000.AD3(VSS_138) U1000.AD26(AVSS_42) U1000.AE6(VSS_139) U1000.AE14(AVSS_43) U1000.AE17(AVSS_44) U1000.AE20(AVSS_45) U1000.AE21(VSS_140) U1000.AE27(AVSS_46) U1000.AE28(AVSS_47) U1000.AF3(VSS_141) U1000.AF9(AVSS_48) U1000.AF11(AVSS_49) U1000.AF12(AVSS_50) U1000.AF14(AVSS_51) U1000.AF15(AVSS_52) U1000.AF17(AVSS_53) U1000.AF18(AVSS_54) U1000.AF20(AVSS_55) U1000.AF21(AVSS_56) U1000.AF26(VSS_142) U1000.AG5(VSS_143) U1000.AG18(AVSS_57) U1000.AH1(VSS_144) U1000.AH8(VSS_145) U1000.AH18(AVSS_58) U1000.AH23(AVSS_59) U1000.AH28(VSS_146) U1000.B5(VSS_8) U1000.B9(VSS_9) U1000.B12(VSS_10) U1000.B16(VSS_11) U1000.B23(VSS_12) U1000.B26(VSS_13) U1000.C3(VSS_14) U1000.C6(VSS_15) U1000.C8(VSS_16) U1000.C9(VSS_17) U1000.C11(VSS_18) U1000.C12(VSS_19) U1000.C14(VSS_20) U1000.C15(VSS_21) U1000.C17(VSS_22) U1000.C18(VSS_23) U1000.C25(VSS_24) U1000.D2(VSS_25) U1000.D3(VSS_26) U1000.D11(VSS_27) U1000.D28(VSS_28) U1000.E3(VSS_29) U1000.E7(VSS_30) U1000.F1(VSS_31) U1000.F3(VSS_32) U1000.F9(VSS_33) U1000.F12(VSS_34) U1000.F14(VSS_35) U1000.F15(VSS_36) U1000.F17(VSS_37) U1000.G5(VSS_38) U1000.G6(VSS_39) U1000.G8(VSS_40) U1000.G9(VSS_41) U1000.G11(VSS_42) U1000.G12(VSS_43) U1000.G14(VSS_44) U1000.G15(VSS_45) U1000.G17(VSS_46) U1000.G18(VSS_47) U1000.G24(VSS_48) U1000.H2(VSS_49) U1000.H3(VSS_50) U1000.H6(VSS_51) U1000.J3(VSS_52) U1000.J5(VSS_53) U1000.J8(DDR_AVSS) U1000.J17(VSS_54) U1000.J18(VSS_55) U1000.J20(VSS_56) U1000.J22(VSS_57) U1000.J26(VSS_58) U1000.J27(AVSS_1) U1000.K1(VSS_59) U1000.K11(VSS_60) U1000.K12(VSS_61) U1000.K13(VSS_62) U1000.K14(VSS_63) U1000.K19(VSS_64) U1000.L3(VSS_65) U1000.L5(VSS_66) U1000.L8(VSS_67) U1000.L11(VSS_68) U1000.L13(VSS_69) U1000.L14(VSS_70) U1000.L19(VSS_71) U1000.L20(VSS_72) U1000.L21(VSS_73) U1000.L24(AVSS_2) U1000.L26(AVSS_3) U1000.M2(VSS_74) U1000.M3(VSS_75) U1000.M6(VSS_76) U1000.M8(VSS_77) U1000.M11(VSS_78) U1000.M13(VSS_79) U1000.M14(VSS_80) U1000.M16(VSS_81) U1000.M18(VSS_82) U1000.M21(AVSS_4) U1000.M26(AVSS_5) U1000.N1(VSS_83) U1000.N11(SYSPLL_AVSS) U1000.N12(VSS_84) U1000.N14(VSS_85) U1000.N15(VSS_86) U1000.N17(VSS_87) U1000.N18(VSS_88) U1000.N28(AVSS_6) U1000.P3(VSS_89) U1000.P6(VSS_90) U1000.P12(VSS_91) U1000.P14(VSS_92) U1000.P15(VSS_93) U1000.P17(VSS_94) U1000.P21(AVSS_7) U1000.P26(AVSS_8) U1000.R3(VSS_95) U1000.R6(VSS_96) U1000.R10(VSS_97) U1000.R11(VSS_98) U1000.R14(VSS_99) U1000.R15(VSS_100) U1000.R17(VSS_101) U1000.R18(VSS_102) U1000.R19(VSS_103) U1000.R23(AVSS_9) U1000.R26(AVSS_10) U1000.T10(VSS_104) U1000.T11(VSS_105) U1000.T14(VSS_106) U1000.T15(VSS_107) U1000.T17(VSS_108) U1000.T18(VSS_109) U1000.T19(VSS_110) U1000.U1(VSS_111) U1000.U6(VSS_112) U1000.U7(VSS_113) U1000.U8(VSS_114) U1000.U10(VSS_115) U1000.U14(VSS_116) U1000.U15(VSS_117) U1000.U16(VSS_118) U1000.U17(VSS_119) U1000.U18(VSS_120) U1000.U23(AVSS_11) U1000.U26(AVSS_12) U1000.V3(VSS_121) U1000.V8(VSS_122) U1000.V9(VSS_123) U1000.V13(VSS_124) U1000.V14(AVSS_13) U1000.V15(AVSS_14) U1000.V16(AVSS_15) U1000.V20(PMUPLL_AVSS) U1000.V22(AVSS_16) U1000.V23(AVSS_17) U1000.V26(AVSS_18) U1000.W10(VSS_125) U1000.W11(VSS_126) U1000.W12(VSS_127) U1000.W13(VSS_128) U1000.W17(AVSS_19) U1000.Y8(VSS_129) U1000.Y9(VSS_130) U1000.Y11(VSS_131) U1000.Y12(VSS_132) U1000.Y18(AVSS_20) U1000.Y23(AVSS_21) U1000.Y24(AVSS_22) U1000.Y26(AVSS_23) U3500.A2(VSSQ#A2) U3500.A8(VSSQ#A8) U3500.B2(VSS#B2) U3500.C9(VSSQ#C9) U3500.D2(VSSQ#D2) U3500.D8(VSSQ#D8) U3500.E1(VSS#E1) U3500.E3(VSSQ#E3) U3500.E8(VSSQ#E8) U3500.F1(VSSQ#F1) U3500.G8(VSS#G8) U3500.H1(VSSQ#H1) U3500.H9(VSSQ#H9) U3500.K1(VSS#K1) U3500.K9(VSS#K9) U3500.N1(VSS#N1) U3500.N9(TEN) U3500.T1(VSS#T1) U3500.T3(PAR) U3501.A2(VSSQ#A2) U3501.A8(VSSQ#A8) U3501.B2(VSS#B2) U3501.C9(VSSQ#C9) U3501.D2(VSSQ#D2) U3501.D8(VSSQ#D8) U3501.E1(VSS#E1) U3501.E3(VSSQ#E3) U3501.E8(VSSQ#E8) U3501.F1(VSSQ#F1) U3501.G8(VSS#G8) U3501.H1(VSSQ#H1) U3501.H9(VSSQ#H9) U3501.K1(VSS#K1) U3501.K9(VSS#K9) U3501.N1(VSS#N1) U3501.N9(TEN) U3501.T1(VSS#T1) U3501.T3(PAR) U3504.A2(VSSQ#A2) U3504.A8(VSSQ#A8) U3504.B2(VSS#B2) U3504.C9(VSSQ#C9) U3504.D2(VSSQ#D2) U3504.D8(VSSQ#D8) U3504.E1(VSS#E1) U3504.E3(VSSQ#E3) U3504.E8(VSSQ#E8) U3504.F1(VSSQ#F1) U3504.G8(VSS#G8) U3504.H1(VSSQ#H1) U3504.H9(VSSQ#H9) U3504.K1(VSS#K1) U3504.K9(VSS#K9) U3504.N1(VSS#N1) U3504.N9(TEN) U3504.T1(VSS#T1) U3504.T3(PAR) U3506.2(GND) U3507.2(GND) U3507.9(EPAD) Y1200.2(GND#2) Y1200.4(GND#4)
VCC3V3_PMU: C1203.1 C1210.1 R1204.1 R1205.1 R1206.1 R1207.1 R3516.1 U1000.W19(PMUIO2) U1000.Y20(PMUIO1)
VCC3V3_SYS: C3530.1 U3506.1(IN)
VCC5V0_SYS: C3551.1 C3552.1 U3507.6(VCNTL)
VCC25_DDR: C3531.1 C3532.1 C3533.1 C3534.1 C3535.1 C3536.1 C3537.1 C3538.1 U3500.B1(VPP1) U3500.R9(VPP2) U3501.B1(VPP1) U3501.R9(VPP2) U3504.B1(VPP1) U3504.R9(VPP2) U3506.5(OUT)
VCC_1V8: C1511.1 R1509.2 R1610.2 U1000.H20(OTP_VCC18)
VCC_3V3: C1401.1 C1404.1 C1509.1 C1800.1 R1511.2 R1611.2 R1800.1 R1801.1 R1804.1 R1805.1 U1000.M23(USB3_AVDD_3V3) U1000.P10(USB2_AVDD_3V3) U1000.V10(VCCIO5_1) U1000.V11(VCCIO5_2) U1000.V12(VCCIO7)
VCC_DDR: C1100.1 C1101.1 C1102.1 C1103.1 C1104.1 C3502.1 C3522.1 C3527.1 C3528.1 C3547.1 C3548.1 C3557.1 C3558.1 C3559.1 C3560.1 C3561.1 C3562.1 C3563.1 C3564.1 C3565.1 C3566.1 C3567.1 C3568.1 C3569.1 C3570.1 C3571.1 C3572.1 C3573.1 C3574.1 C3575.1 C3576.1 C3577.1 C3578.1 C3579.1 C3580.1 C3581.1 C3582.1 C3583.1 C3584.1 C3585.1 C3586.1 C3587.1 C3588.1 C3589.1 C3590.1 C3591.1 C3592.1 C3593.1 C3594.1 C3595.1 C3596.1 C3597.1 C3598.1 C3599.1 R3508.1 R3509.1 R3513.1 R3517.1 U1000.H9(DDRPHY_VDDQ_1) U1000.H11(DDRPHY_VDDQ_2) U1000.H12(DDRPHY_VDDQ_3) U1000.H14(DDRPHY_VDDQ_4) U1000.H15(DDRPHY_VDDQ_5) U1000.J9(DDRPHY_VDDQ_6) U1000.J11(DDRPHY_VDDQL_1) U1000.J12(DDRPHY_VDDQL_2) U1000.J14(DDRPHY_VDDQL_3) U1000.K10(DDRPHY_VDDQL_4) U1000.L9(DDRPHY_VDDQ_7) U1000.L10(DDRPHY_VDDQL_5) U1000.M9(DDRPHY_VDDQ_8) U1000.M10(DDRPHY_VDDQL_6) U3500.A1(VDDQ#A1) U3500.A9(VDDQ#A9) U3500.B3(VDD#B3) U3500.B9(VDD#B9) U3500.C1(VDDQ#C1) U3500.D1(VDD#D1) U3500.D9(VDDQ#D9) U3500.F2(VDDQ#F2) U3500.F8(VDDQ#F8) U3500.G1(VDDQ#G1) U3500.G7(VDD#G7) U3500.G9(VDDQ#G9) U3500.J1(VDD#J1) U3500.J2(VDDQ#J2) U3500.J8(VDDQ#J8) U3500.J9(VDD#J9) U3500.L1(VDD#L1) U3500.L9(VDD#L9) U3500.R1(VDD#R1) U3500.T9(VDD#T9) U3501.A1(VDDQ#A1) U3501.A9(VDDQ#A9) U3501.B3(VDD#B3) U3501.B9(VDD#B9) U3501.C1(VDDQ#C1) U3501.D1(VDD#D1) U3501.D9(VDDQ#D9) U3501.F2(VDDQ#F2) U3501.F8(VDDQ#F8) U3501.G1(VDDQ#G1) U3501.G7(VDD#G7) U3501.G9(VDDQ#G9) U3501.J1(VDD#J1) U3501.J2(VDDQ#J2) U3501.J8(VDDQ#J8) U3501.J9(VDD#J9) U3501.L1(VDD#L1) U3501.L9(VDD#L9) U3501.R1(VDD#R1) U3501.T9(VDD#T9) U3504.A1(VDDQ#A1) U3504.A9(VDDQ#A9) U3504.B3(VDD#B3) U3504.B9(VDD#B9) U3504.C1(VDDQ#C1) U3504.D1(VDD#D1) U3504.D9(VDDQ#D9) U3504.F2(VDDQ#F2) U3504.F8(VDDQ#F8) U3504.G1(VDDQ#G1) U3504.G7(VDD#G7) U3504.G9(VDDQ#G9) U3504.J1(VDD#J1) U3504.J2(VDDQ#J2) U3504.J8(VDDQ#J8) U3504.J9(VDD#J9) U3504.L1(VDD#L1) U3504.L9(VDD#L9) U3504.R1(VDD#R1) U3504.T9(VDD#T9) U3507.1(VIN)
VCCA1V8_IMAGE: C1713.1 C1715.1 C1717.1 C1720.1 U1000.M22(EDP_TX_AVDD_1V8) U1000.W18(HDMI_TX_AVDD_1V8)
VCCA1V8_PMU: C1206.1 C1207.1 U1000.Y21(PMUPLL_AVDD_1V8)
VCCA_1V8: C1211.1 C1212.1 C1407.1 C1410.1 C1411.1 C1414.1 C1510.1 R1512.1 U1000.H22(SARADC_AVDD_1V8) U1000.N10(SYSPLL_AVDD_1V8) U1000.R22(MULTI_PHY_AVDD_1V8) U1000.U22(PCIE30_AVDD_1V8)
VCCIO4: C1500.1 R1509.1 R1510.1 R1511.1 U1000.J21(VCCIO4)
VCCIO6: C1602.1 C1603.1 R1606.1 R1607.1 R1610.1 R1611.1 U1000.R9(VCCIO6_1) U1000.U9(VCCIO6_2)
VCCIO_ACODEC: C1900.1 R1900.1 R1901.1 U1000.H17(VCCIO1)
VCCIO_FLASH: C1300.1 U1000.H18(VCCIO2)
VCCIO_SD: C1301.1 U1000.L22(VCCIO3)
VCCIO_WL: R1510.2
VDD_CPU: C1000.1 C1001.1 C1002.1 C1003.1 C1004.1 U1000.J15(VDD_CPU_1) U1000.K15(VDD_CPU_2) U1000.K16(VDD_CPU_3) U1000.K17(VDD_CPU_4) U1000.K18(VDD_CPU_5) U1000.L15(VDD_CPU_6) U1000.L16(VDD_CPU_7) U1000.L17(VDD_CPU_8) U1000.L18(VDD_CPU_9) U1000.M17(VDD_CPU_10)
VDD_CPU_COM: U1000.M15(VDD_CPU_COM)
VDD_GPU: C1012.1 C1013.1 C1014.1 C1015.1 C1016.1 U1000.R13(VDD_GPU_1) U1000.T13(VDD_GPU_2) U1000.U11(VDD_GPU_3) U1000.U12(VDD_GPU_4) U1000.U13(VDD_GPU_5)
VDD_LOGIC: C1005.1 C1006.1 C1007.1 C1008.1 C1009.1 C1010.1 C1011.1 U1000.L12(VDD_LOGIC_1) U1000.M12(VDD_LOGIC_2) U1000.N13(VDD_LOGIC_3) U1000.N16(VDD_LOGIC_4) U1000.P13(VDD_LOGIC_5) U1000.P16(VDD_LOGIC_6) U1000.R12(VDD_LOGIC_7) U1000.R16(VDD_LOGIC_8) U1000.T12(VDD_LOGIC_9) U1000.T16(VDD_LOGIC_10)
VDD_NPU: C1017.1 C1018.1 C1019.1 C1020.1 U1000.M19(VDD_NPU_1) U1000.N19(VDD_NPU_2) U1000.P18(VDD_NPU_3) U1000.P19(VDD_NPU_4) U1000.P20(VDD_NPU_5)
VDDA0V9_IMAGE: C1714.1 C1716.1 C1718.1 C1719.1 U1000.M20(EDP_TX_AVDD_0V9) U1000.V17(HDMI_TX_AVDD_0V9_1) U1000.V18(HDMI_TX_AVDD_0V9_2)
VDDA0V9_PMU: C1204.1 C1205.1 C1213.1 C1214.1 U1000.V19(PMU_VDD_LOGIC_0V9) U1000.V21(PMUPLL_AVDD_0V9)
VDDA_0V9: C1208.1 C1209.1 C1408.1 C1409.1 C1412.1 C1413.1 U1000.P11(SYSPLL_AVDD_0V9) U1000.R20(MULTI_PHY_AVDD_0V9_1) U1000.R21(MULTI_PHY_AVDD_0V9_2) U1000.U20(PCIE30_AVDD_0V9_2) U1000.U21(PCIE30_AVDD_0V9_1)
4G_DISABLE_GPIO4_C2: U1000.AF8(GPIO4_C2_D)
4G_PWREN_H_GPIO0_C6: U1000.AD20(GPIO0_C6_D)
BT_REG_ON_H_GPIO2_B7: U1000.H25(GPIO2_B7_D)
BT_WAKE_HOST_H_GPIO2_C0: U1000.F24(GPIO2_C0_D)
CAN0_RX_M1: R1304.1 U1000.H28(GPIO2_A2_D)
CAN0_TX_M1: U1000.H27(GPIO2_A1_U)
CIF_CLKOUT: R1609.2
CIF_CLKOUT_SOC: R1609.1 U1000.U3(GPIO4_C0_D)
CLK32K_OUT1_WIFI: R1508.2
DDR4_A0: RP3505.4 U1000.B6(AC0) U3500.P3(A0) U3501.P3(A0) U3504.P3(A0)
DDR4_A1: RP3500.4 U1000.F5(AC1) U3500.P7(A1) U3501.P7(A1) U3504.P7(A1)
DDR4_A2: RP3501.1 U1000.B1(AC2) U3500.R3(A2) U3501.R3(A2) U3504.R3(A2)
DDR4_A3: RP3503.2 U1000.F4(AC3) U3500.N7(A3) U3501.N7(A3) U3504.N7(A3)
DDR4_A4: RP3505.1 U1000.D9(AC4) U3500.N3(A4) U3501.N3(A4) U3504.N3(A4)
DDR4_A5: RP3503.1 U1000.B7(AC5) U3500.P8(A5) U3501.P8(A5) U3504.P8(A5)
DDR4_A6: RP3501.4 U1000.A7(AC6) U3500.P2(A6) U3501.P2(A6) U3504.P2(A6)
DDR4_A7: RP3500.1 U1000.A8(AC7) U3500.R8(A7) U3501.R8(A7) U3504.R8(A7)
DDR4_A8: RP3501.3 U1000.C1(AC8) U3500.R2(A8) U3501.R2(A8) U3504.R2(A8)
DDR4_A9: RP3500.3 U1000.A5(AC9) U3500.R7(A9) U3501.R7(A9) U3504.R7(A9)
DDR4_A10: RP3505.2 U1000.D6(AC10) U3500.M3(A10/AP) U3501.M3(A10/AP) U3504.M3(A10/AP)
DDR4_A11: RP3501.2 U1000.C2(AC11) U3500.T2(A11) U3501.T2(A11) U3504.T2(A11)
DDR4_A12: RP3503.4 U1000.C4(AC12) U3500.M7(A12/BC_N) U3501.M7(A12/BC_N) U3504.M7(A12/BC_N)
DDR4_A13: RP3500.2 U1000.B8(AC13) U3500.T8(A13) U3501.T8(A13) U3504.T8(A13)
DDR4_A14_WEN: RP3504.3 U1000.C5(AC14) U3500.L2(WE_N/A14) U3501.L2(WE_N/A14) U3504.L2(WE_N/A14)
DDR4_A15_CASN: RP3502.1 U1000.E4(AC15) U3500.M8(CAS_N/A15) U3501.M8(CAS_N/A15) U3504.M8(CAS_N/A15)
DDR4_A16_RASN: RP3502.3 U1000.D5(AC16) U3500.L8(RAS_N/A16) U3501.L8(RAS_N/A16) U3504.L8(RAS_N/A16)
DDR4_ACTN: RP3504.2 U1000.E6(AC17) U3500.L3(ACT_N) U3501.L3(ACT_N) U3504.L3(ACT_N)
DDR4_BA0: RP3505.3 U1000.E11(AC18) U3500.N2(BA0) U3501.N2(BA0) U3504.N2(BA0)
DDR4_BA1: RP3503.3 U1000.E9(AC19) U3500.N8(BA1) U3501.N8(BA1) U3504.N8(BA1)
DDR4_BG0: RP3504.1 U1000.F8(AC20) U3500.M2(BG0) U3501.M2(BG0) U3504.M2(BG0)
DDR4_BG1: R3530.2 U1000.F7(AC21)
DDR4_CKE: R3502.2 RP3502.4 U1000.B3(AC22) U3500.K2(CKE) U3504.K2(CKE)
DDR4_CKE_1: R3502.1 U3501.K2(CKE)
DDR4_CLKN: C1111.2 R3522.1 U1000.A4(AC24) U3500.K8(CK_N) U3501.K8(CK_N) U3504.K8(CK_N)
DDR4_CLKP: C1111.1 R3521.1 U1000.B4(AC23) U3500.K7(CK_P) U3501.K7(CK_P) U3504.K7(CK_P)
DDR4_CS0N: R3503.2 RP3502.2 U1000.A2(AC25) U3500.L7(CS_N) U3504.L7(CS_N)
DDR4_CS0N_1: R3503.1 U3501.L7(CS_N)
DDR4_DML_A: U1000.H5(DDR_DM0_A) U3500.E7(DML_N/DBIL_N)
DDR4_DML_B: U1000.E17(DDR_DM1_B) U3501.E7(DML_N/DBIL_N)
DDR4_DMU_A: U1000.J4(DDR_DM1_A) U3500.E2(DMU_N/DBIU_N)
DDR4_DMU_B: U1000.D14(DDR_DM0_B) U3501.E2(DMU_N/DBIU_N)
DDR4_DQL0_A: U1000.F2(DDR_DQ0_A) U3500.G2(DQL0)
DDR4_DQL0_B: U1000.A16(DDR_DQ8_B) U3501.G2(DQL0)
DDR4_DQL1_A: U1000.H4(DDR_DQ7_A) U3500.F7(DQL1)
DDR4_DQL1_B: U1000.D17(DDR_DQ14_B) U3501.F7(DQL1)
DDR4_DQL2_A: U1000.E1(DDR_DQ1_A) U3500.H3(DQL2)
DDR4_DQL2_B: U1000.B17(DDR_DQ9_B) U3501.H3(DQL2)
DDR4_DQL3_A: U1000.H1(DDR_DQ6_A) U3500.H7(DQL3)
DDR4_DQL3_B: U1000.B14(DDR_DQ15_B) U3501.H7(DQL3)
DDR4_DQL4_A: U1000.E2(DDR_DQ2_A) U3500.H2(DQL4)
DDR4_DQL4_B: U1000.A17(DDR_DQ10_B) U3501.H2(DQL4)
DDR4_DQL5_A: U1000.J2(DDR_DQ5_A) U3500.H8(DQL5)
DDR4_DQL5_B: U1000.A13(DDR_DQ13_B) U3501.H8(DQL5)
DDR4_DQL6_A: U1000.D1(DDR_DQ3_A) U3500.J3(DQL6)
DDR4_DQL6_B: U1000.B18(DDR_DQ11_B) U3501.J3(DQL6)
DDR4_DQL7_A: U1000.J1(DDR_DQ4_A) U3500.J7(DQL7)
DDR4_DQL7_B: U1000.B13(DDR_DQ12_B) U3501.J7(DQL7)
DDR4_DQSL_N_A: U1000.G2(DDR_DQS0N_A) U3500.F3(DQSL_N)
DDR4_DQSL_N_B: U1000.A15(DDR_DQS1N_B) U3501.F3(DQSL_N)
DDR4_DQSL_P_A: U1000.G1(DDR_DQS0P_A) U3500.G3(DQSL_P)
DDR4_DQSL_P_B: U1000.B15(DDR_DQS1P_B) U3501.G3(DQSL_P)
DDR4_DQSU_N_A: U1000.L1(DDR_DQS1N_A) U3500.A7(DQSU_N)
DDR4_DQSU_N_B: U1000.B11(DDR_DQS0N_B) U3501.A7(DQSU_N)
DDR4_DQSU_P_A: U1000.L2(DDR_DQS1P_A) U3500.B7(DQSU_P)
DDR4_DQSU_P_B: U1000.A11(DDR_DQS0P_B) U3501.B7(DQSU_P)
DDR4_DQU0_A: U1000.L4(DDR_DQ15_A) U3500.A3(DQU0)
DDR4_DQU0_B: U1000.A12(DDR_DQ4_B) U3501.A3(DQU0)
DDR4_DQU1_A: U1000.N2(DDR_DQ9_A) U3500.B8(DQU1)
DDR4_DQU1_B: U1000.E12(DDR_DQ3_B) U3501.B8(DQU1)
DDR4_DQU2_A: U1000.K2(DDR_DQ12_A) U3500.C3(DQU2)
DDR4_DQU2_B: U1000.E14(DDR_DQ7_B) U3501.C3(DQU2)
DDR4_DQU3_A: U1000.M1(DDR_DQ8_A) U3500.C7(DQU3)
DDR4_DQU3_B: U1000.D12(DDR_DQ2_B) U3501.C7(DQU3)
DDR4_DQU4_A: U1000.J6(DDR_DQ13_A) U3500.C2(DQU4)
DDR4_DQU4_B: U1000.E15(DDR_DQ6_B) U3501.C2(DQU4)
DDR4_DQU5_A: U1000.L6(DDR_DQ11_A) U3500.C8(DQU5)
DDR4_DQU5_B: U1000.A9(DDR_DQ1_B) U3501.C8(DQU5)
DDR4_DQU6_A: U1000.J7(DDR_DQ14_A) U3500.D3(DQU6)
DDR4_DQU6_B: U1000.D15(DDR_DQ5_B) U3501.D3(DQU6)
DDR4_DQU7_A: U1000.L7(DDR_DQ10_A) U3500.D7(DQU7)
DDR4_DQU7_B: U1000.B10(DDR_DQ0_B) U3501.D7(DQU7)
DDR4_ECC_DM: U1000.P7(DDR_ECC_DM) U3504.E7(DML_N/DBIL_N)
DDR4_ECC_DQ0: U1000.M4(DDR_ECC_DQ1) U3504.G2(DQL0)
DDR4_ECC_DQ1: U1000.R5(DDR_ECC_DQ3) U3504.F7(DQL1)
DDR4_ECC_DQ2: U1000.M5(DDR_ECC_DQ2) U3504.H3(DQL2)
DDR4_ECC_DQ3: U1000.P4(DDR_ECC_DQ6) U3504.H7(DQL3)
DDR4_ECC_DQ4: U1000.R7(DDR_ECC_DQ5) U3504.H2(DQL4)
DDR4_ECC_DQ5: U1000.R4(DDR_ECC_DQ7) U3504.H8(DQL5)
DDR4_ECC_DQ6: U1000.M7(DDR_ECC_DQ4) U3504.J3(DQL6)
DDR4_ECC_DQ7: U1000.P5(DDR_ECC_DQ0) U3504.J7(DQL7)
DDR4_ECC_DQS_N: U1000.P1(DDR_ECC_DQS_N) U3504.F3(DQSL_N)
DDR4_ECC_DQS_P: U1000.P2(DDR_ECC_DQS_P) U3504.G3(DQSL_P)
DDR4_ODT0: R3504.2 RP3504.4 U1000.E8(AC27) U3500.K3(ODT) U3504.K3(ODT)
DDR4_ODT0_1: R3504.1 U3501.K3(ODT)
DDR4_RESETN: C3500.1 C3501.1 C3513.1 U1000.F11(AC29) U3500.P1(RESET_N) U3501.P1(RESET_N) U3504.P1(RESET_N)
DDR_RZQ: R1100.1 U1000.H7(DDR_RZQ)
DDR_VTT: C3504.1 C3505.1 C3506.1 C3507.1 C3509.1 C3510.1 C3511.1 C3512.1 C3514.1 C3515.1 C3516.1 C3517.1 C3518.1 C3519.1 C3520.1 C3521.1 C3554.1 C3555.1 C3556.1 R3521.2 R3522.2 R3523.2 R3537.2 RP3500.5 RP3500.6 RP3500.7 RP3500.8 RP3501.5 RP3501.6 RP3501.7 RP3501.8 RP3502.5 RP3502.6 RP3502.7 RP3502.8 RP3503.5 RP3503.6 RP3503.7 RP3503.8 RP3504.5 RP3504.6 RP3504.7 RP3504.8 RP3505.5 RP3505.6 RP3505.7 RP3505.8
DDRPHY_VREFOUT: C3522.2 C3523.1 R3514.2 U1000.P8(DDR_VREFOUT)
DVP_PWREN0_H_GPIO0_B0: U1000.AD23(GPIO0_B0_U)
